# Altium PCB rf practical board.PcbDoc (part 1 of 2)
Units mm, origin at the board's own origin, x right, y up, seen from the top; angles counter-clockwise.
Board outline 70.56 x 65.43 mm, 4 copper layers (L1, L2, L3, L4), stack 0.603 mm thick; 77 components, 60 nets, 362 pads, 171 vias.
Unrouted connection lines stored in the file: 193.
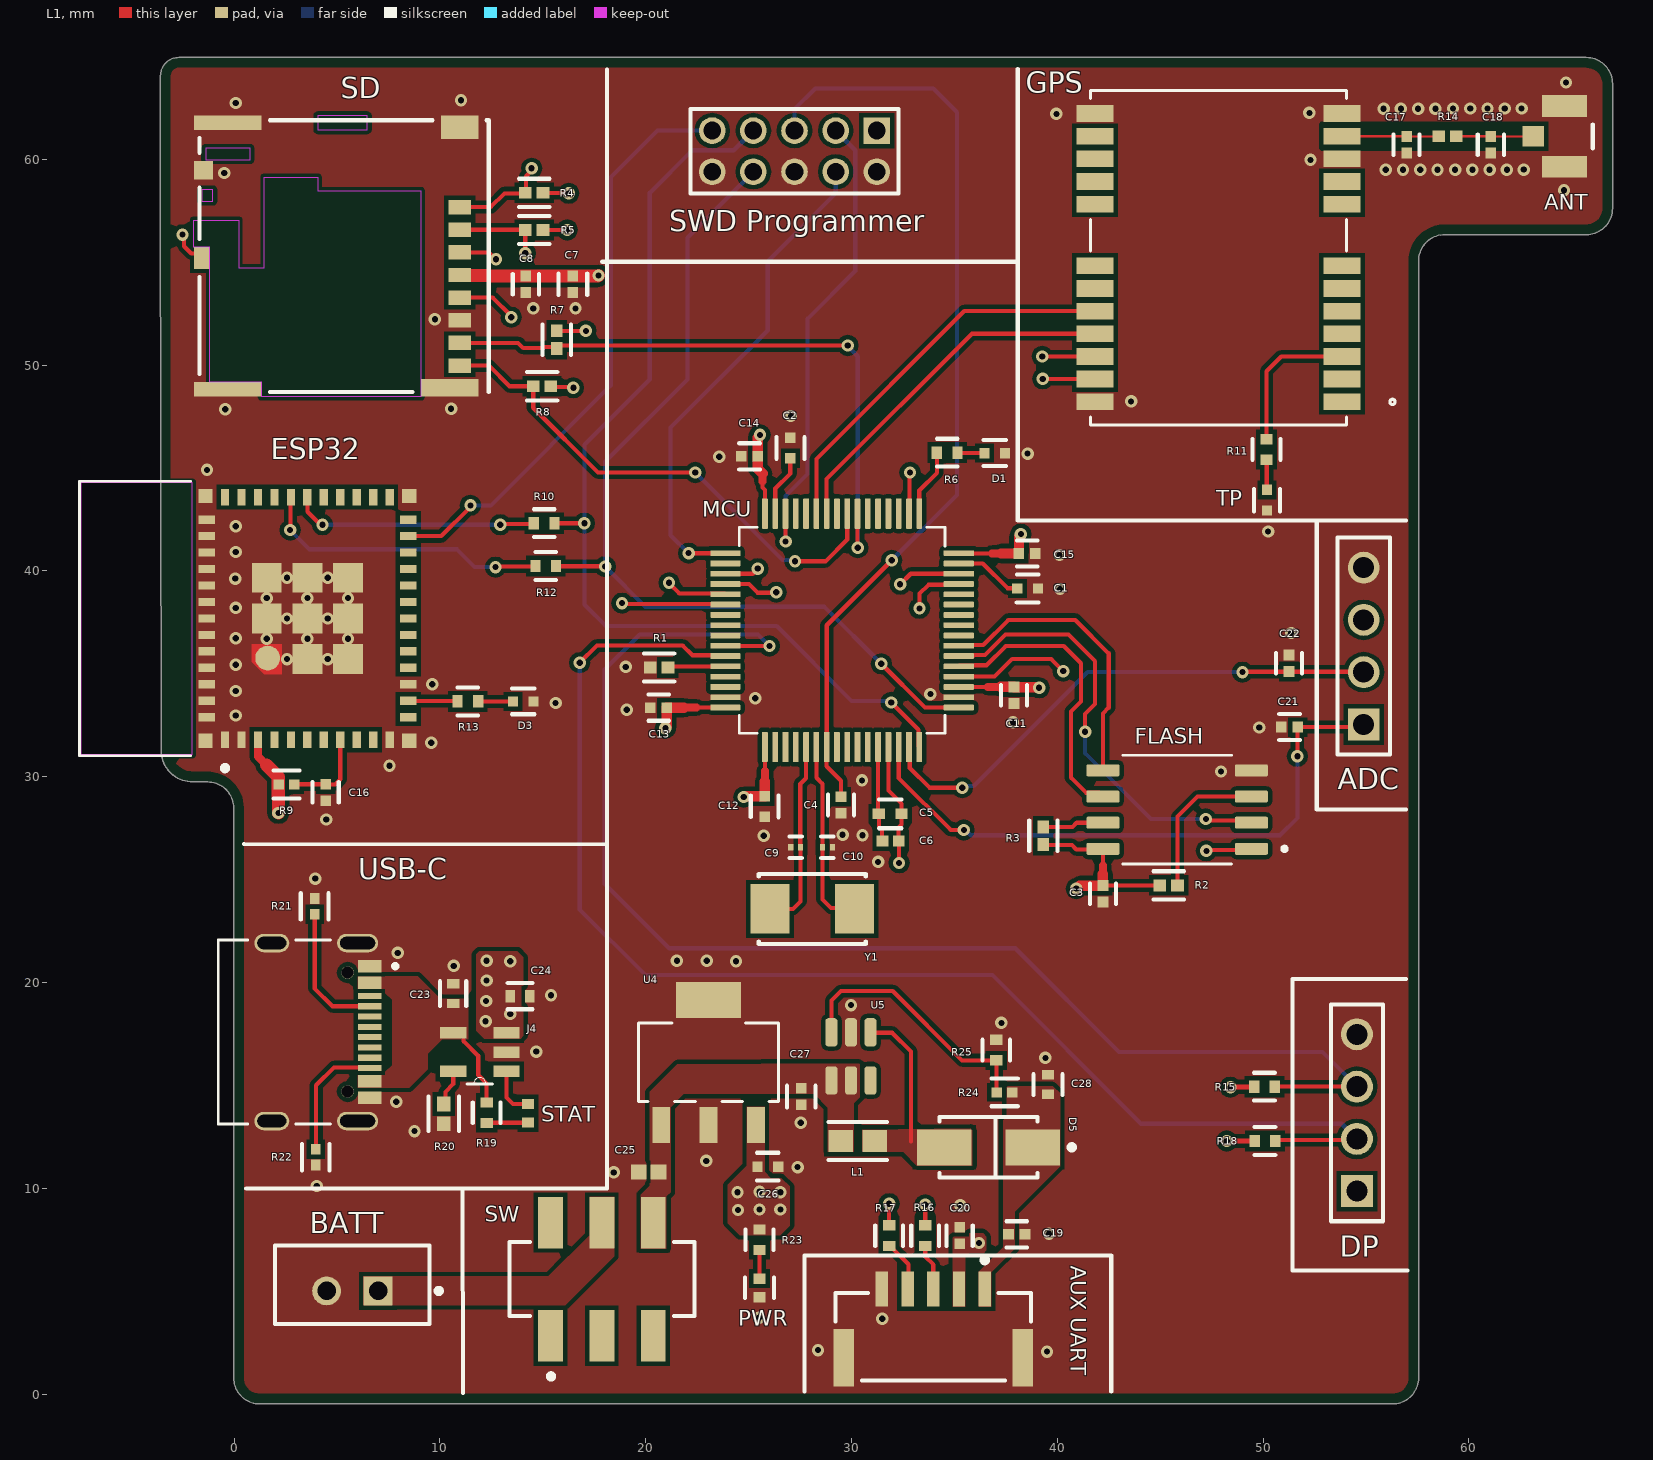
[diagram p0: L1 view]
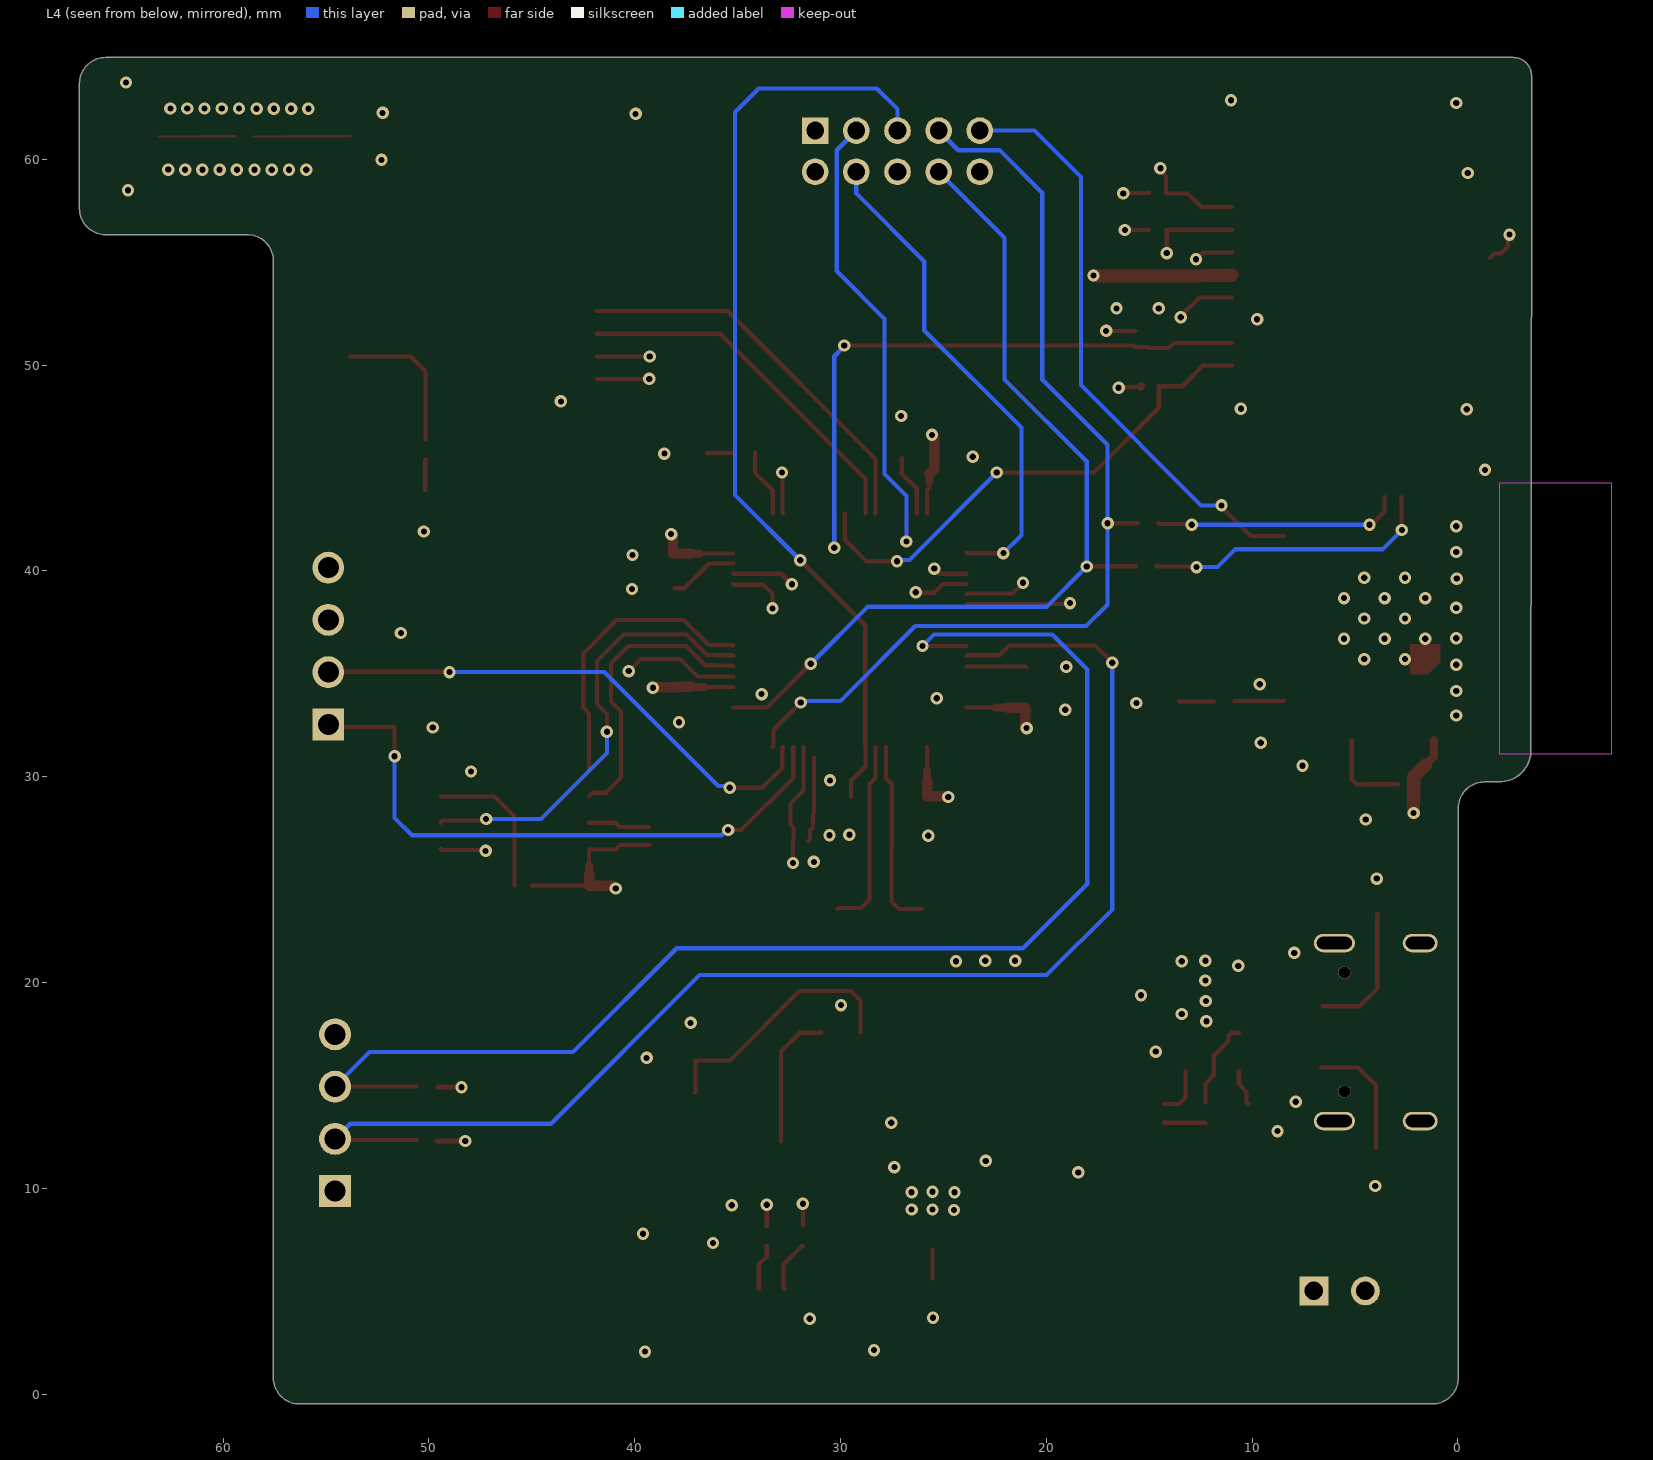
[diagram p1: L4 view, seen from below]
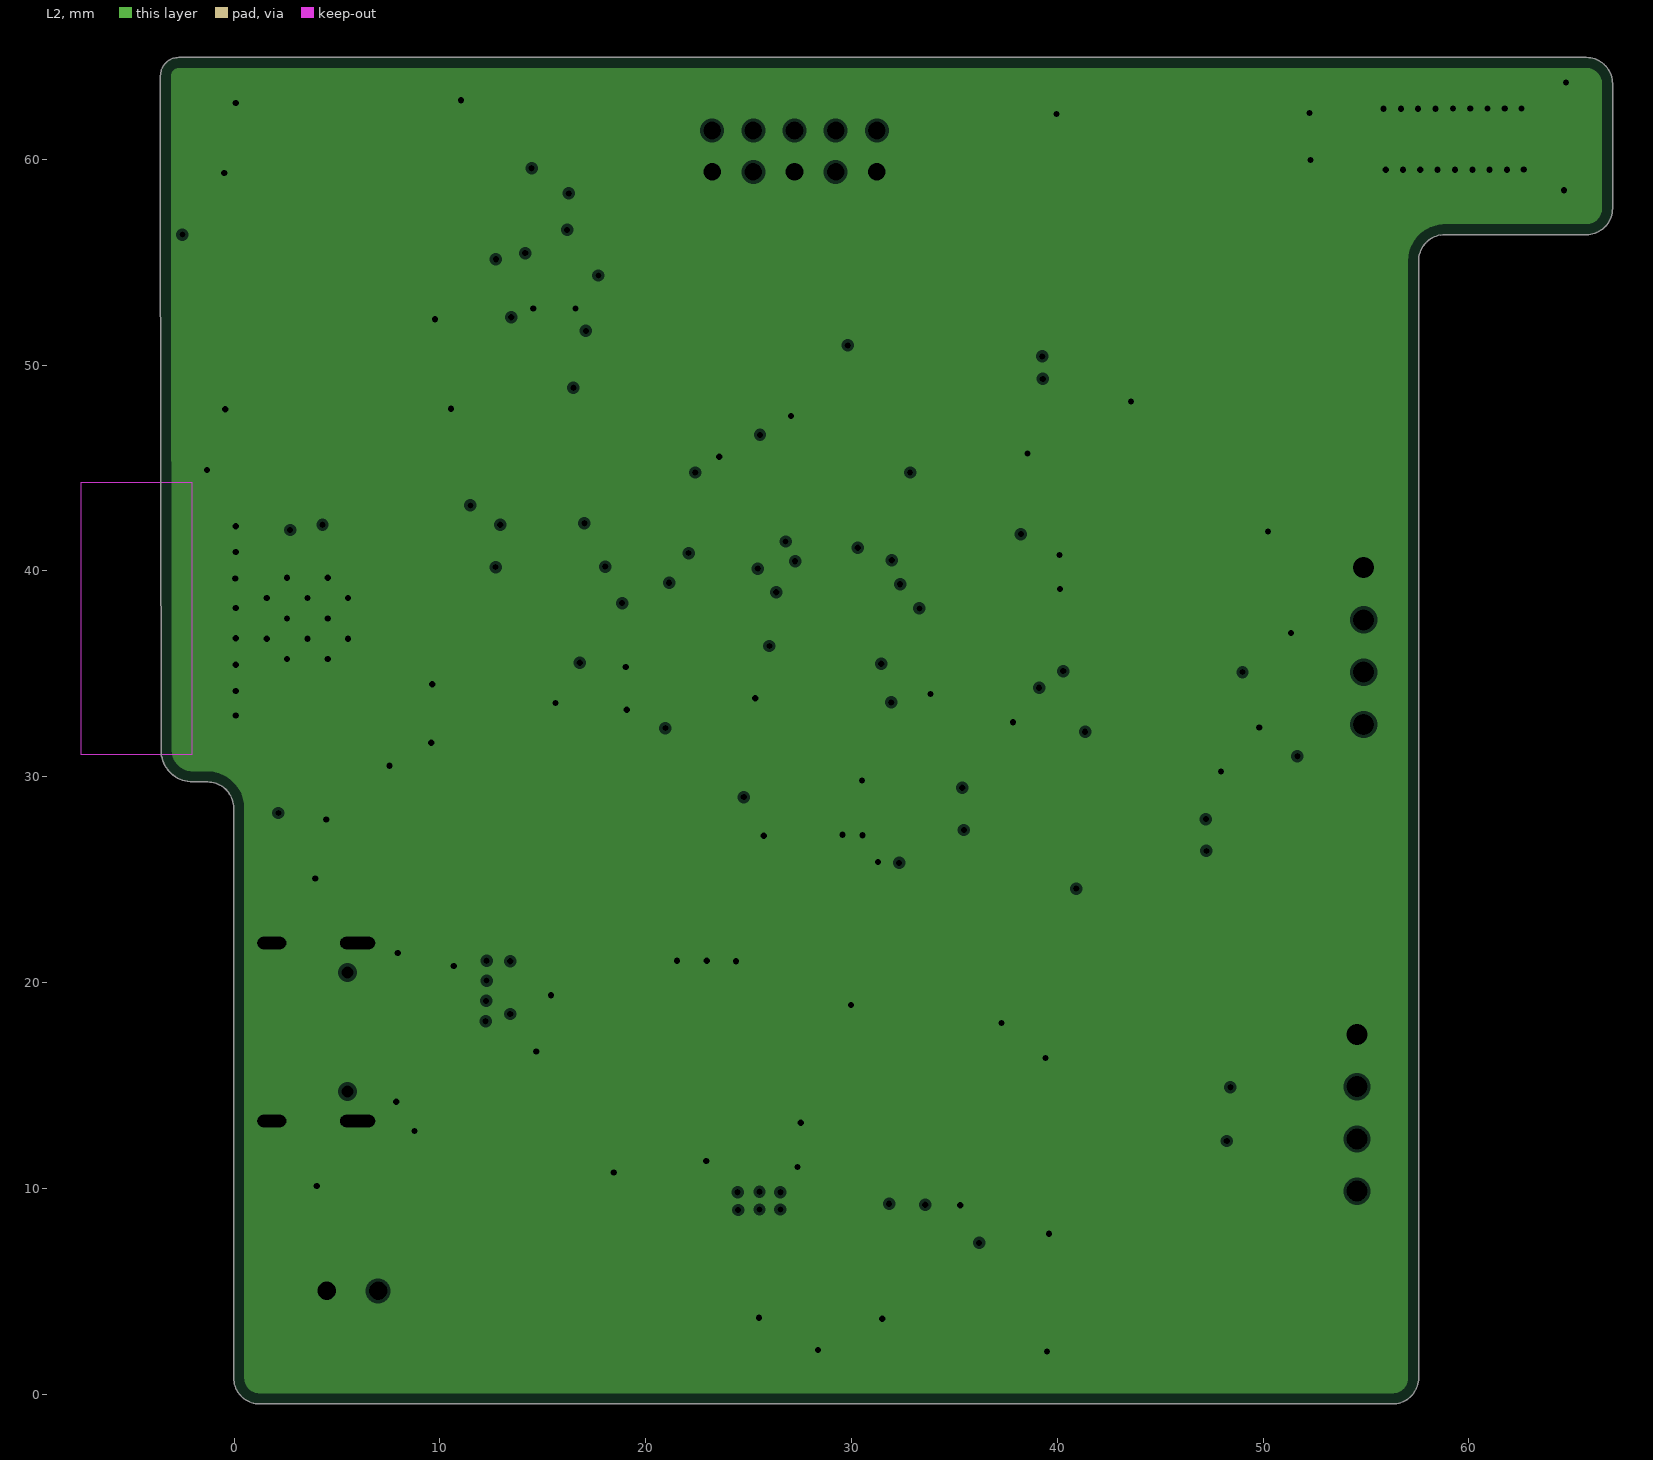
[diagram p2: L2, clearances drawn from the general rule]
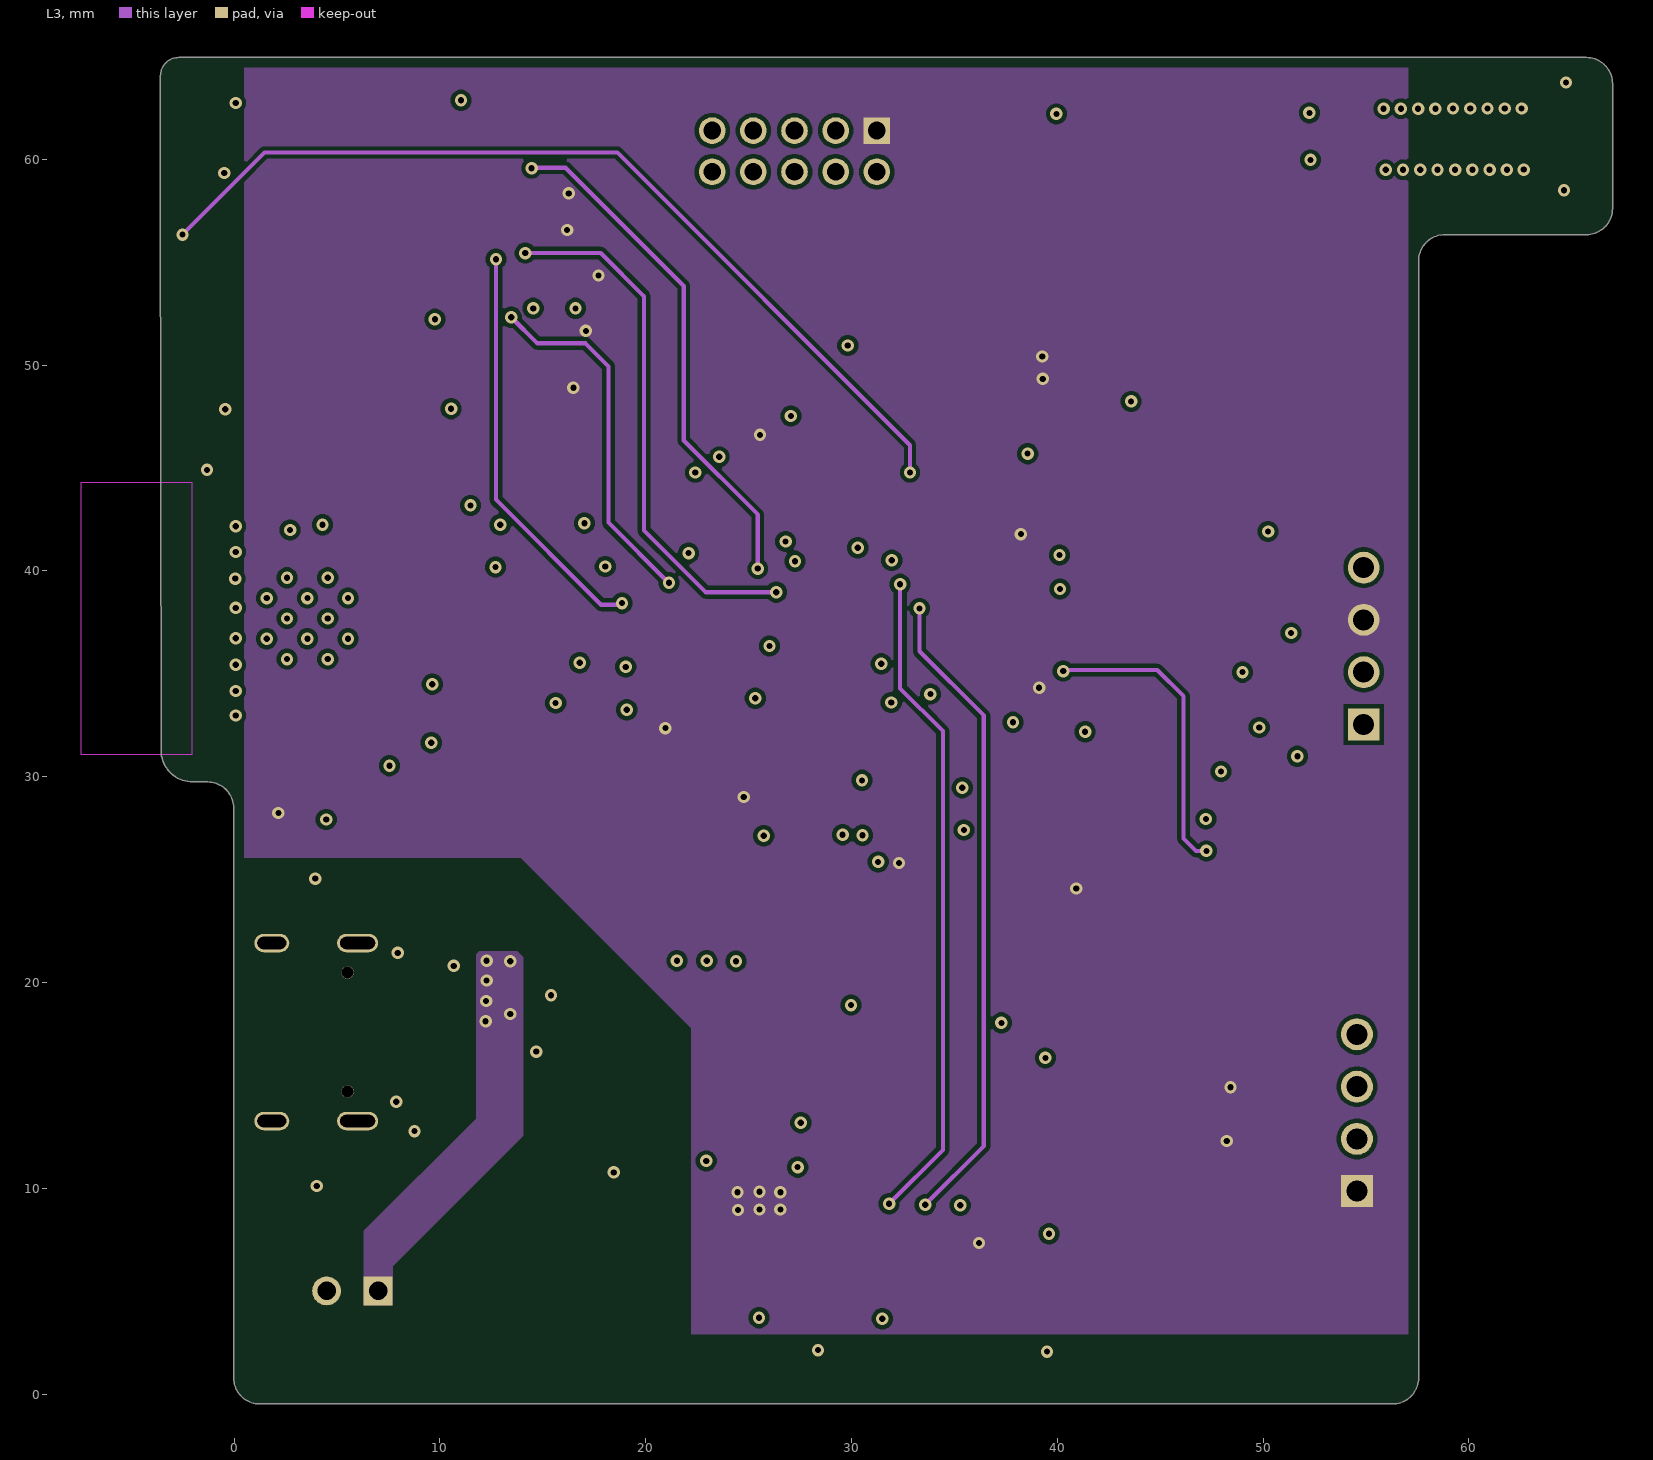
[diagram p3: L3]
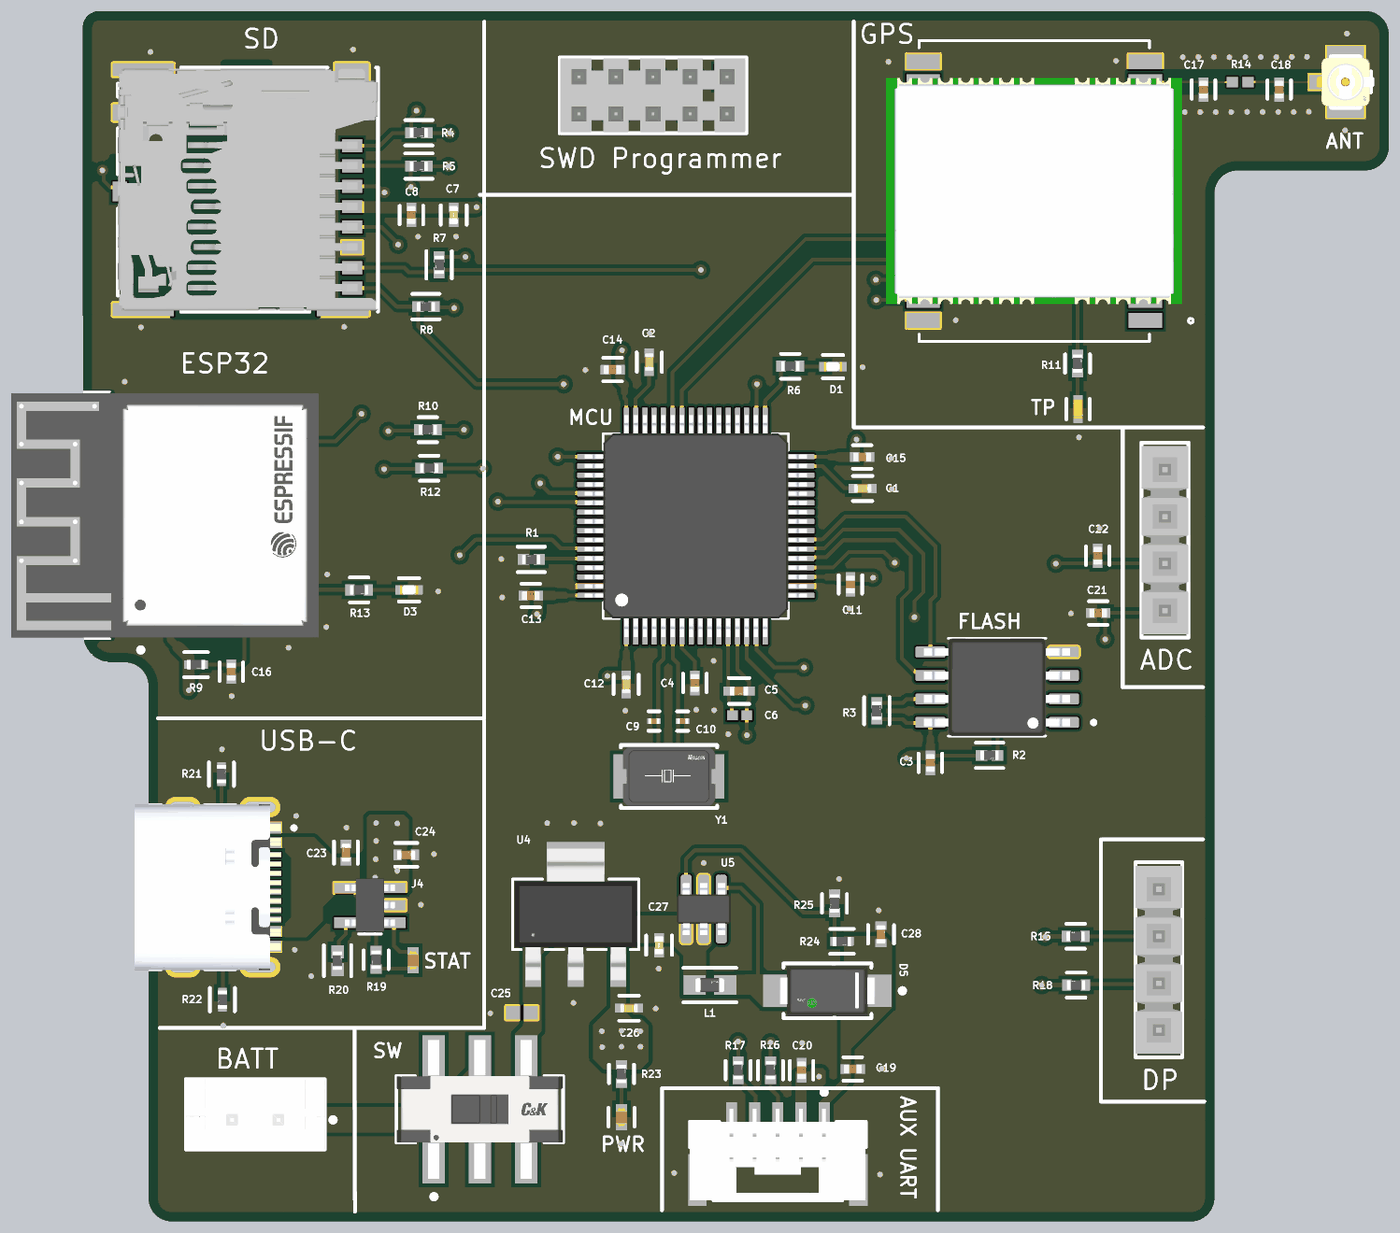
[diagram p4: 3D render of the assembled board from above, using the file's embedded part models]

## Layer stack, top to bottom
Top Solder: solder mask 0.0102, Solder Resist, Dk 3.5
L1: signal copper 0.0356
Dielectric 2: prepreg 0.0711, PP-006, Dk 4.1
L2: plane copper 0.035, net GND
Dielectric 1: dielectric 0.32, FR-4, Dk 4.8
L3: signal copper 0.035
Dielectric 3: prepreg 0.0711, PP-006, Dk 4.1
L4: signal copper 0.0356
Bottom Solder: solder mask 0.0102, Solder Resist, Dk 3.5

## Board outline
1.245,-0.483 cw(c1.245,0.787) -0.025,0.787 -0.025,28.473 ccw(c-1.295,28.473) -1.295,29.743 -2.016,29.743 cw(c-2.016,31.282) -3.554,31.282 -3.581,59.334 -3.581,64.059 cw(c-2.692,64.059) -2.692,64.948 65.71,64.948 cw(c65.71,63.678) 66.98,63.678 66.98,57.607 cw(c65.71,57.607) 65.71,56.337 58.826,56.337 ccw(c58.826,55.067) 57.556,55.067 57.556,44.475 57.556,0.787 cw(c56.286,0.787) 56.286,-0.483

## Design rules (kind name [scope] priority, off if disabled: settings)
Clearance [All] p1: gap=0.203 ignorepadtopadclearanceinfootprint=TRUE
MinimumSolderMaskSliver [All] p1: minsoldermaskwidth=0
NetAntennae [Not IsVia] p1: netantennaetolerance=0.508
PlaneClearance [All] p1: clearance=0.152
PlaneConnect [All] p1: pad.planeconnectstyle=Relief pad.reliefexpansion=0.508 pad.reliefentries=4 pad.reliefconductorwidth=0.254 pad.reliefairgap=0.254 via.planeconnectstyle=Direct via.reliefexpansion=0.508 via.reliefentries=4 via.reliefconductorwidth=0.254 via.reliefairgap=0.254
PolygonConnect [All] p1: connectstyle=Direct reliefconductorwidth=0.254 reliefentries=4 polygonreliefangle="90 Angle" airgapwidth=0.254
RoutingVias [All] p1: holewidth=0.711 width=1.27 viastyle="Through Hole" minholewidth=0.3 minwidth=0.6 maxholewidth=0.711 maxwidth=1.27
ShortCircuit [All] p1: allowed=TRUE
SilkToSilkClearance [All] p1: silktosilkclearance=0.076
SilkToSolderMaskClearance [IsPad] p1: minsilkscreentomaskgap=0.051 clearancetoexposedcopper=TRUE
SolderMaskExpansion [All] p1: expansion=0.102 istentingtop=FALSE
SupplyNets "Schematic Supply Nets" [InNet('GND')] p1: voltage=0.000
Width [All] p1: maxlimit=1.27 minlimit=0.102 preferedwidth=0.203 minimp=50.000000 maximp=50.000000 favimp=50.000000
23 further rules are at their usual default settings.

## Classes and differential pairs
component class U_RF_Sensors: C16 C17 C18 D3 J1 J2 MD1 P2 P3 R9 R10 R11 R12 R13 R14 TP U3
component class U_Power: C23 C24 C25 C26 C27 C28 D5 J3 J4 L1 PWR R19 R20 R21 R22 R23 R24 R25 STAT SW1 U4 U5 USB-C
component class U_MCU,SD,FLASH: C1 C2 C3 C4 C5 C6 C7 C8 C9 C10 C11 C12 C13 C14 C15 D1 P1 R1 R2 R3 R4 R5 R6 R7 R8 SD1 U1 U2 Y1

## Components (designator, comment, footprint, x,y, rotation, side; value= is the part's Value field where it differs from the comment)
ADC "TSW-104-08-L-S" SMTC-TSW-104-08-X-S 54.889,32.537 r90 top
ANT "U.FL-R-SMT-1(10)" FP-U_FL-R-SMT-1_10-MFG 64.643,61.112 r90 top (schematic designator J1)
"AUX UART" "BM05B-GHS-TBT (LF)(SN)(N)" FP-BM05B-GHS-TBT_LF_SN-MFG 33.974,2.78 r0 top
BATT "B2B-EH(LF)(SN)" FP-B2B-EH_LF_SN-MFG 5.74,5.309 r180 top (schematic designator J3)
C1 "2.2uF" FP-CC0402-MFG 38.557,39.141 r0 top value="2.2 uF"
C2 "2.2uF" FP-CC0402-MFG 27.026,45.974 r90 top value="2.2 uF"
C3 "100nF" FP-C0402-BB-MFG 42.215,24.308 r90 top value="0.10 μF"
C4 "100nF" FP-C0402-BB-MFG 29.489,28.626 r90 top value="0.10 μF"
C5 "0402YD105MAT2A" FP-0402-L_1_0_1-W_0_5_0_1-MFG 31.877,28.194 r0 top
C6 "04025C103JAT2A" CAPC1005X56X25LL10T15 31.902,26.873 r180 top
C7 "10uF" FP-C0402C106M9PACTU-MFG 16.459,53.924 r270 top
C8 "100nF" FP-C0402-BB-MFG 14.173,53.924 r90 top value="0.10 μF"
C9 "18pF" FP-GJM033-0_03P-MFG 27.28,26.568 r180 top
C10 "18pF" FP-GJM033-0_03P-MFG 28.829,26.568 r0 top
C11 "100nF" FP-C0402-BB-MFG 37.897,33.953 r90 top value="0.10 μF"
C12 "4.7uF" FP-CC0402-MFG 25.781,28.55 r270 top value="4.7 uF"
C13 "100nF" FP-C0402-BB-MFG 20.625,33.35 r0 top value="0.10 μF"
C14 "100nF" FP-C0402-BB-MFG 25.044,45.568 r0 top value="0.10 μF"
C15 "100nF" FP-C0402-BB-MFG 38.532,40.843 r180 top value="0.10 μF"
C16 "C0402C104M8RACTU" FP-C0402-BB-MFG 4.445,29.235 r90 top value="0.10 μF"
C17 "C0402C104M8RACTU" FP-C0402-BB-MFG 56.972,60.706 r90 top value="18 pF"
C18 "C0402C104M8RACTU" FP-C0402-BB-MFG 61.062,60.706 r90 top value="18 pF"
C19 "100nF" FP-C0402-BB-MFG 38.024,7.76 r0 top value="0.10 μF"
C20 "100nF" FP-C0402-BB-MFG 35.255,7.696 r90 top value="0.10 μF"
C21 "100nF" FP-C0402-BB-MFG 51.283,32.41 r0 top value="0.10 μF"
C22 "100nF" FP-C0402-BB-MFG 51.257,35.509 r270 top value="0.10 μF"
C23 "GRM155C80J475ME01D" FP-GRM155-0_2-MFG 10.643,19.456 r90 top
C24 "GRM155C80J475ME01D" FP-GRM155-0_2-MFG 13.894,19.329 r0 top
C25 "C0402C105M9PACTU" CAPC1005X60X30ML05T10 20.142,10.795 r180 top
C26 "CC0402KRX5R7BB225" FP-CC0402-CC-MFG 25.933,11.049 r0 top
C27 "10uF" FP-C0402C106M9PACTU-MFG 27.559,14.453 r90 top
C28 "22uF" FP-GRM158-0_2-MFG 39.548,15.037 r90 top
D1 "QBLP595-IB" FP-QBLP595-IB-MFG 36.957,45.72 r180 top
D3 "QBLP595-IB" FP-QBLP595-IB-MFG 14.046,33.655 r180 top
D5 "SS14" FP-403AE-MFG 36.652,11.989 r0 top
DP "TSW-104-08-L-S" SMTC-TSW-104-08-X-S 54.559,9.855 r90 top
ESP32 "ESP32-C3-MINI-1-N4" FP-ESP32-C3-MINI-1-N4-MFG 3.556,37.687 r90 top (schematic designator MD1)
FLASH "W25Q128JVSIQ" SOIC127P790X216-8N 45.822,28.397 r180 top (schematic designator U2)
GPS "NEO-M8T-0" NEO-M8T_UBL 47.828,55.22 r180 top (schematic designator U3)
J4 "MCP73831T-2ACI/OT" SOT95P280X145-5N 11.938,16.612 r180 top
L1 "MLZ1608N220LT000" FP-MLZ1608-IPC_A 30.302,12.294 r0 top
MCU "STM32F405RGT6" QFP50P1200X1200X160-64N 29.54,37.109 r90 top locked (schematic designator U1)
PWR "SML-P12VTT86R" FP-SML-P1-MFG 25.527,5.156 r90 top (schematic designator D6)
R1 "10k" FP-AF0402-IPC_B 20.65,35.306 r180 top
R2 "10k" FP-AF0402-IPC_B 45.412,24.714 r0 top
R3 "10k" FP-AF0402-IPC_B 39.319,27.127 r90 top
R4 "10k" FP-AF0402-IPC_B 14.58,58.369 r0 top
R5 "10k" FP-AF0402-IPC_B 14.58,56.566 r0 top
R6 "AC0402JR-13470RL" FP-AC0402-MFG 34.646,45.745 r0 top
R7 "10k" FP-AF0402-IPC_B 15.672,51.232 r270 top
R8 "10k" FP-AF0402-IPC_B 14.961,48.971 r180 top
R9 "AC0402DR-07510KL" FP-AC0402-IPC_C 2.54,29.616 r0 top
R10 "100" FP-AC0402-MFG 15.062,42.316 r0 top
R11 "AC0402JR-13470RL" FP-AC0402-MFG 50.165,45.898 r90 top
R12 "100" FP-AC0402-MFG 15.138,40.234 r0 top
R13 "AC0402JR-13470RL" FP-AC0402-MFG 11.354,33.655 r0 top
R14 "RC0402JR-100RL" RESC1005X40X25NL05T10 58.953,61.112 r0 top
R15 "AC0402FR-134K7L" FP-AC0402-MFG 50.063,14.935 r180 top
R16 "100" FP-AC0402-MFG 33.579,7.696 r90 top
R17 "100" FP-AC0402-MFG 31.826,7.696 r90 top
R18 "AC0402FR-134K7L" FP-AC0402-MFG 50.089,12.294 r180 top
R19 "AC0402JR-13470RL" FP-AC0402-MFG 12.268,13.665 r270 top
R20 "AC0402FR-132KL" FP-AC0402-IPC_A 10.185,13.614 r90 top
R21 "AC0402JR-075K1L" FP-AC0402-IPC_C 3.912,23.698 r90 top
R22 "AC0402JR-075K1L" FP-AC0402-IPC_C 3.962,11.506 r270 top
R23 "10k" FP-AC0402-MFG 25.527,7.493 r90 top
R24 "73.2k" FP-AF0402-IPC_C 37.44,14.656 r0 top
R25 "10k" FP-AC0402-MFG 37.033,16.713 r270 top
SD "503398-1892" MOLX-503398-1892_V 4.699,55.296 r270 top (schematic designator SD1)
STAT "SML-P12VTT86R" FP-SML-P1-MFG 14.275,13.64 r90 top (schematic designator D4)
SW "JS202011SCQN" FP-JS202011SCQN-MFG 17.871,5.581 r0 top (schematic designator SW1)
"SWD Programmer" "PTT-105-01-L-D" SMTC-PTT-105-01-X-D 31.229,61.392 r180 top
TP "QBLP595-Y" FP-QBLP595-Y-MFG 50.19,43.434 r90 top (schematic designator D2)
U4 "AP7361C-33E-13" SOT223_DIO 23.052,16.116 r0 top
U5 "MT3608" SOT95P280X145-6N 29.972,16.408 r270 top
USB-C "TYPE-C-31-M-12" HRO_TYPE-C-31-M-12 1.829,17.59 r270 top (schematic designator J5)
Y1 "ABM3-8.000MHZ-B4Y-T" FP-ABM3-MFG 28.092,23.571 r0 top

## Footprints (in the part's own frame and the unit in brackets; to place one, negate y for a bottom-side part, rotate by r counter-clockwise, add the part's x,y. Pads: shape width x height; smd on the part's side, far side on the other; paste and mask are expansions set on the pad)
CAPC1005X56X25LL10T15 [mm] "Chip Capacitor, 2-Leads, Body 1.00x0.50mm, IPC High Density"
  rect 0.58x0.54 smd: 1(-0.39,0) 2(0.39,0)
  body extent -0.55,-0.3 0.55,0.3, height 0.56
CAPC1005X60X30ML05T10 [mm] "Chip Capacitor, 2-Leads, Body 1.00x0.50mm, IPC Low Density"
  rect 0.76x0.72 smd: 1(-0.48,0) 2(0.48,0)
  body extent -0.53,-0.28 0.53,0.27, height 0.6
FP-0402-L_1_0_1-W_0_5_0_1-MFG [mm]
  rect 0.6x0.5 smd paste+0 mask+0: 1(-0.55,0) 2(0.55,0)
  silkscreen extent -0.55,-0.7 0.55,0.7, body extent -0.95,-0.4 0.95,0.4, height 0.25
FP-403AE-MFG [mm]
  rect 2.65x1.75 smd paste+0 mask+0: 1(-2.15,0) 2(2.15,0)
  silkscreen extent -2.37,-1.48 4.18,1.48, body extent -3.57,-1.58 3.57,1.58, height 0.25
FP-ABM3-MFG [mm]
  rect 1.9x2.4 smd paste+0 mask+0: 1(-2.05,0) 2(2.05,0)
  silkscreen extent -2.6,-1.7 2.6,1.7, body extent -3.1,-1.8 3.1,1.8, height 0.25
FP-AC0402-IPC_A [mm]
  rect 0.715x0.672 smd paste+0 mask+0: 1(-0.479,0) 2(0.479,0)
  silkscreen extent -0.84,-0.74 0.84,0.74, body extent -1.04,-0.54 1.04,0.54, height 0.25
FP-AC0402-IPC_C [mm]
  rect 0.515x0.472 smd paste+0 mask+0: 1(-0.379,0) 2(0.379,0)
  silkscreen extent -0.64,-0.67 0.64,0.67, body extent -0.74,-0.38 0.74,0.38, height 0.25
FP-AC0402-MFG [mm]
  rect 0.5x0.6 smd paste+0 mask+0: 1(-0.5,0) 2(0.5,0)
  silkscreen extent -0.5,-0.67 0.5,0.67, body extent -0.85,-0.4 0.85,0.4, height 0.25
FP-AF0402-IPC_B [mm]
  rect 0.615x0.572 smd paste+0 mask+0: 1(-0.429,0) 2(0.429,0)
  silkscreen extent -0.74,-0.69 0.74,0.69, body extent -0.89,-0.44 0.89,0.44, height 0.25
FP-AF0402-IPC_C [mm]
  rect 0.515x0.472 smd paste+0 mask+0: 1(-0.379,0) 2(0.379,0)
  silkscreen extent -0.64,-0.67 0.64,0.67, body extent -0.74,-0.38 0.74,0.38, height 0.25
FP-B2B-EH_LF_SN-MFG [mm]
  rect 1.4x1.4 hole 0.9 paste-2539.97 mask+0: 1(-1.25,0.3)
  round 1.4 hole 0.9 paste-2539.97 mask+0: 2(1.25,0.3)
  silkscreen extent -4.33,-1.9 3.75,1.9, body extent -3.85,-2 3.85,2, height 0.25
FP-BM05B-GHS-TBT_LF_SN-MFG [mm]
  rect 0.6x1.7 smd paste+0 mask+0: 1(2.5,2.325) 2(1.25,2.325) 3(0,2.325) 4(-1.25,2.325) 5(-2.5,2.325)
  rect 1x2.8 smd paste+0 mask+0: 6(-4.35,-1.025) 7(4.35,-1.025)
  silkscreen extent -4.75,-2.12 4.75,3.85, body extent -4.95,-2.52 4.95,3.27, height 0.25
FP-C0402-BB-MFG [mm]
  rect 0.52x0.52 smd paste+0 mask+0: 1(-0.4,0) 2(0.4,0)
  silkscreen extent -0.5,-0.64 0.5,0.64, body extent -0.8,-0.4 0.8,0.4, height 0.25
FP-C0402C106M9PACTU-MFG [mm]
  rect 0.52x0.52 smd paste+0 mask+0: 1(-0.4,0) 2(0.4,0)
  silkscreen extent -0.53,-0.7 0.53,0.7, body extent -0.76,-0.38 0.76,0.38, height 0.25
FP-CC0402-CC-MFG [mm]
  rect 0.5x0.5 smd paste+0 mask+0: 1(-0.5,0) 2(0.5,0)
  silkscreen extent -0.53,-0.68 0.53,0.67, body extent -0.95,-0.55 0.95,0.55, height 0.25
FP-CC0402-MFG [mm]
  rect 0.5x0.5 smd paste+0 mask+0: 1(-0.5,0) 2(0.5,0)
  silkscreen extent -0.53,-0.68 0.53,0.67, body extent -0.87,-0.48 0.87,0.48, height 0.25
FP-ESP32-C3-MINI-1-N4-MFG [mm]
  rect 0.8x0.4 smd paste+0 mask+0: 1(-5.9,4) 2(-5.9,3.2) 3(-5.9,2.4) 4(-5.9,1.6) 5(-5.9,0.8) 6(-5.9,0) 7(-5.9,-0.8) 8(-5.9,-1.6) 9(-5.9,-2.4) 10(-5.9,-3.2) 11(-5.9,-4) 25(5.9,-4) 26(5.9,-3.2) 27(5.9,-2.4) 28(5.9,-1.6) 29(5.9,-0.8) 30(5.9,0) 31(5.9,0.8) 32(5.9,1.6) 33(5.9,2.4) 34(5.9,3.2) 35(5.9,4)
  rect 0.4x0.8 smd paste+0 mask+0: 12(-4.8,-4.9) 13(-4,-4.9) 14(-3.2,-4.9) 15(-2.4,-4.9) 16(-1.6,-4.9) 17(-0.8,-4.9) 18(0,-4.9) 19(0.8,-4.9) 20(1.6,-4.9) 21(2.4,-4.9) 22(3.2,-4.9) 23(4,-4.9) 24(4.8,-4.9) 36(4.8,4.9) 37(4,4.9) 38(3.2,4.9) 39(2.4,4.9) 40(1.6,4.9) 41(0.8,4.9) 42(0,4.9) 43(-0.8,4.9) 44(-1.6,4.9) 45(-2.4,4.9) 46(-3.2,4.9) 47(-4,4.9) 48(-4.8,4.9)
  rect 1.45x1.45 smd paste+0 mask+0: 49(-1.975,-1.975) 49(-1.975,0) 49(0,1.975) 49(0,0) 49(0,-1.975) 49(1.975,-1.975) 49(1.975,0) 49(1.975,1.975)
  round 1.207 smd paste+0 mask+0: 49(-1.926,1.926)
  rect 0.7x0.7 smd paste+0 mask+0: 50(5.95,4.95) 51(5.95,-4.95) 52(-5.95,-4.95) 53(-5.95,4.95)
  L1 region: -2.7,1.25 -2.7,2.1 -2.1,2.7 -1.25,2.7 -1.25,1.25
  Keep-Out Layer region: -6.6,5.6 6.6,5.6 6.6,11 -6.6,11
  silkscreen extent -7.4,3.87 6.68,11.07, body extent -6.78,-5.77 6.78,11.17, height 0.25
FP-GJM033-0_03P-MFG [mm]
  rect 0.25x0.3 smd paste+0 mask+0: 1(-0.238,0) 2(0.238,0)
  silkscreen extent -0.3,-0.53 0.3,0.53, body extent -0.46,-0.27 0.46,0.27, height 0.25
FP-GRM155-0_2-MFG [mm]
  rect 0.45x0.6 smd paste+0 mask+0: 1(-0.475,0) 2(0.475,0)
  silkscreen extent -0.6,-0.64 0.6,0.65, body extent -0.8,-0.45 0.8,0.45, height 0.25
FP-GRM158-0_2-MFG [mm]
  rect 0.45x0.6 smd paste+0 mask+0: 1(-0.475,0) 2(0.475,0)
  silkscreen extent -0.5,-0.7 0.5,0.7, body extent -0.8,-0.45 0.8,0.45, height 0.25
FP-JS202011SCQN-MFG [mm]
  rect 1.2x2.5 smd paste+0 mask+0: 1(-2.5,-2.75) 2(0,-2.75) 3(2.5,-2.75) 4(-2.5,2.75) 5(0,2.75) 6(2.5,2.75)
  silkscreen extent -4.5,-4.85 4.5,1.8, body extent -4.6,-4.1 4.6,4.1, height 0.25
FP-MLZ1608-IPC_A [mm]
  rect 1.206x1.058 smd paste+0 mask+0: 1(-0.826,0) 2(0.826,0)
  silkscreen extent -1.43,-0.93 1.43,0.93, body extent -1.93,-1.03 1.93,1.03, height 0.25
FP-QBLP595-IB-MFG [mm]
  rect 0.5x0.5 smd paste+0 mask+0: 1(-0.5,0) 2(0.5,0)
  silkscreen extent -0.55,-0.63 0.55,0.63, body extent -0.85,-0.4 0.85,0.4, height 0.25
FP-QBLP595-Y-MFG [mm]
  rect 0.5x0.5 smd paste+0 mask+0: 1(-0.5,0) 2(0.5,0)
  silkscreen extent -0.56,-0.63 0.55,0.63, body extent -0.85,-0.4 0.85,0.4, height 0.25
FP-SML-P1-MFG [mm]
  rect 0.5x0.6 smd paste+0 mask+0: 1(-0.45,0) 2(0.45,0)
  silkscreen extent -0.5,-0.7 0.5,0.7, body extent -0.8,-0.43 0.8,0.43, height 0.25
FP-U_FL-R-SMT-1_10-MFG [mm]
  rect 1x1.05 smd paste-1000 mask+0: 1(0,1.525)
  rect 1.05x2.2 smd paste-1000 mask+0: 2(-1.475,0) 3(1.475,0)
  silkscreen extent -0.58,-1.38 0.58,-1.38, body extent -2.1,-1.48 2.1,2.15, height 0.25
HRO_TYPE-C-31-M-12 [mm]
  rect 0.6x1.14 smd mask+0.05: A1_B12(-3.2,4.75) A4_B9(-2.4,4.75) B1_A12(3.2,4.75) B4_A9(2.4,4.75)
  rect 0.3x1.14 smd mask+0.05: A5(-1.25,4.75) A6(-0.25,4.75) A7(0.25,4.75) A8(1.25,4.75) B5(1.75,4.75) B6(0.75,4.75) B7(-0.75,4.75) B8(-1.75,4.75)
  oval 0.9x2 hole 0.6 slot 1.7 at 90 deg: S1(-4.325,4.17) S2(4.325,4.17)
  oval 0.9x1.7 hole 0.6 slot 1.4 at 90 deg: S3(-4.325,0) S4(4.325,0)
  round 0.6 hole 0.6 unplated: ""(-2.89,3.68) ""(2.89,3.68)
  silkscreen extent -4.47,-2.6 4.47,6.1, body extent -4.47,-2.6 4.47,5.31, height 3.31
MOLX-503398-1892_V [mm] "CONN, 8-Leads, Body 14.05x13.2mm, Pitch 1.1mm"
  rect 0.7x1.1 smd: 1(-2.38,6.27) 2(-1.28,6.27) 3(-0.18,6.27) 4(0.92,6.27) 5(2.02,6.27) 6(3.12,6.27) 7(4.22,6.27) 8(5.32,6.27)
  rect 1.05x0.78 smd: 9(0.095,-6.27)
  rect 0.9x0.93 smd: 10(-4.17,-6.195)
  rect 0.86x2.8 smd: 11(6.4,5.77)
  rect 0.7x3.3 smd: 12(6.48,-5.01) 13(-6.48,-5.01)
  rect 1.14x1.83 smd: 14(-6.26,6.255)
  L1 keep-out region: -3.22,-6.28 -2.67,-6.28 -2.67,-5.73 -3.22,-5.73
  L1 keep-out region: -5.235,-6.08 -4.685,-6.08 -4.685,-3.93 -5.235,-3.93
  L1 keep-out region: -6.83,-0.63 -6.13,-0.63 -6.13,1.77 -6.83,1.77
  L1 keep-out region: 6.83,4.37 6.83,-3.36 6.13,-3.36 6.13,-5.88 -0.43,-5.88 -0.43,-6.66 -1.73,-6.66 -1.73,-4.48 0.57,-4.48 0.57,-3.23 -3.82,-3.23 -3.82,-0.63 -3.17,-0.63 -3.17,4.37
  silkscreen extent -6.6,-6.38 6.6,7.67, body extent -6.55,-6.38 6.55,7.67, height 1.28
NEO-M8T_UBL [mm]
  rect 1.803x0.813 smd: 1(-6,7) 2(-6,5.9) 3(-6,4.8) 4(-6,3.7) 5(-6,2.6) 6(-6,1.5) 7(-6,0.4) 8(-6,-2.6) 9(-6,-3.7) 10(-6,-4.8) 11(-6,-5.9) 12(-6,-7) 13(6,-7) 14(6,-5.9) 15(6,-4.8) 16(6,-3.7) 17(6,-2.6) 18(6,0.4) 19(6,1.5) 20(6,2.6) 21(6,3.7) 22(6,4.8) 23(6,5.9) 24(6,7)
  silkscreen extent -8.59,-8.13 6.22,8.13, body extent -8,-6.1 8,6.1, height 2.6
QFP50P1200X1200X160-64N [mm]
  rrect25% 1.47x0.28 smd: 1(-5.67,3.75) 2(-5.67,3.25) 3(-5.67,2.75) 4(-5.67,2.25) 5(-5.67,1.75) 6(-5.67,1.25) 7(-5.67,0.75) 8(-5.67,0.25) 9(-5.67,-0.25) 10(-5.67,-0.75) 11(-5.67,-1.25) 12(-5.67,-1.75) 13(-5.67,-2.25) 14(-5.67,-2.75) 15(-5.67,-3.25) 16(-5.67,-3.75) 33(5.67,-3.75) 34(5.67,-3.25) 35(5.67,-2.75) 36(5.67,-2.25) 37(5.67,-1.75) 38(5.67,-1.25) 39(5.67,-0.75) 40(5.67,-0.25) 41(5.67,0.25) 42(5.67,0.75) 43(5.67,1.25) 44(5.67,1.75) 45(5.67,2.25) 46(5.67,2.75) 47(5.67,3.25) 48(5.67,3.75)
  rrect25% 0.28x1.47 smd: 17(-3.75,-5.67) 18(-3.25,-5.67) 19(-2.75,-5.67) 20(-2.25,-5.67) 21(-1.75,-5.67) 22(-1.25,-5.67) 23(-0.75,-5.67) 24(-0.25,-5.67) 25(0.25,-5.67) 26(0.75,-5.67) 27(1.25,-5.67) 28(1.75,-5.67) 29(2.25,-5.67) 30(2.75,-5.67) 31(3.25,-5.67) 32(3.75,-5.67) 49(3.75,5.67) 50(3.25,5.67) 51(2.75,5.67) 52(2.25,5.67) 53(1.75,5.67) 54(1.25,5.67) 55(0.75,5.67) 56(0.25,5.67) 57(-0.25,5.67) 58(-0.75,5.67) 59(-1.25,5.67) 60(-1.75,5.67) 61(-2.25,5.67) 62(-2.75,5.67) 63(-3.25,5.67) 64(-3.75,5.67)
  silkscreen extent -5,-5 5,5, body extent -6,-6 6,6, height 1.6
RESC1005X40X25NL05T10 [mm] "Chip Resistor, 2-Leads, Body 1.00x0.50mm, IPC Medium Density"
  rect 0.6x0.55 smd: 1(-0.425,0) 2(0.425,0)
  body extent -0.53,-0.27 0.53,0.28, height 0.4
SMTC-PTT-105-01-X-D [mil] "Press Fit Terminal Strip, 2x5 Pins, Vertical, 2mm Pitch, Male"
  rect 51x51 hole 34: 1(0,0)
  round 51 hole 34: 2(0,78.74) 3(78.74,0) 4(78.74,78.74) 5(157.48,0) 6(157.48,78.74) 7(236.22,0) 8(236.22,78.74) 9(314.96,0) 10(314.96,78.74)
  silkscreen extent -41,-41 356,120, body extent -39,-39 354,118, height 205
SMTC-TSW-104-08-X-S [mm] ".025 SQ Post Terminal Strip Assembly, 1x4 Pins, Vertical, 2.54mm Pitch, Male"
  rect 1.55x1.55 hole 1.02: 1(0,0)
  round 1.55 hole 1.02: 2(2.54,0) 3(5.08,0) 4(7.62,0)
  silkscreen extent -1.46,-1.27 9.08,1.27, body extent -1.27,-1.27 8.89,1.27, height 8.38
SOIC127P790X216-8N [mm]
  rrect25% 1.61x0.58 smd: 1(-3.605,1.905) 2(-3.605,0.635) 3(-3.605,-0.635) 4(-3.605,-1.905) 5(3.605,-1.905) 6(3.605,-0.635) 7(3.605,0.635) 8(3.605,1.905)
  silkscreen extent -5.32,-2.64 2.64,2.64, body extent -3.95,-2.64 3.95,2.64, height 2.16
SOT95P280X145-5N [mil]
  rect 50x22 smd: 1(-51,37) 2(-51,0) 3(-51,-37) 4(51,-37) 5(51,37)
  silkscreen extent -24,49 24,61, body extent -53,-57 53,57, height 57
SOT95P280X145-6N [mm]
  rrect50% 1.37x0.59 smd: 1(-1.17,0.95) 2(-1.17,0) 3(-1.17,-0.95) 4(1.17,-0.95) 5(1.17,0) 6(1.17,0.95)
  body extent -1.4,-1.45 1.4,1.45, height 1.45
SOT223_DIO [mil]
  rect 34x69 smd paste+0 mask+0: 1(-90.55,-119.5) 2(0,-119.5) 3(90.55,-119.5)
  rect 124x69 smd paste+0 mask+0: 4(0,119.5)
  silkscreen extent -134,-75 134,75, body extent -129,-140 129,140, height 71

## Part data
ADC DP: library part CMP-1024-00358-1, "0.025\" SQ Post Header, Through-hole, Vertical, -55 to 125 degC, 2.54 mm Pitch, 4-Pin, Male, RoHS", Manufacturer=Samtec, Temperature Range="-55 to 125 degC", ComponentLink1Description="Manufacturer URL", ComponentLink1URL=http://www.samtec.com, ComponentLink2Description=Datasheet, ComponentLink2URL=http://www.samtec.com/documents/webfiles/pdf/TSW_TH.PDF, ComponentLink3Description="Package Specification", ComponentLink3URL=http://www.samtec.com/documents/webfiles/cpdf/TSW-XXX-XX-XXX-X-XX-XXX-MKT.pdf, DatasheetVersion=F-214, Mounting Technology=Through-hole, Orientation=Vertical, PackageDescription=".025[0.64] SQ. Post Terminal Strip Assembly", PackageReference=TSW-104-08-X-S, PackageVersion="DM, 8/1988", PartNumber=TSW-104-08-L-S, Pitch="2.54 mm", RoHS=True
ANT: library part CMP-2000-05152-3, "CONN U.FL RCPT STR 50 OHM SMD", Dielectric Material=Polymer, Frequency=6GHz, Housing Color=Beige, Max Operating Temperature=90°C, Min Operating Temperature=-40°C, Package Quantity=2500, Insulation Resistance=500MR, Body Material=Bronze, Body Plating=Silver, Connector Type=Coaxial, Contact Material=Brass, Contact Plating=Gold, Depth=3.1mm, Fastening Type=Snap, Gender=Male, Lead Free="Lead Free", Length=3mm, Max Frequency=6GHz, Mount="Surface Mount", Orientation=Straight, Packaging="Cut Tape", Radiation Hardening=No, REACH SVHC="No SVHC", Series=U.FL, Termination=Solder, Weight=0.001764oz, Wire/Cable Type=Coaxial, Impedance=50R
"AUX UART": library part CMP-17439-000467-1, "CONN HEADER SMD 5POS 1.25MM", Color=Natural, Flammability Rating="UL94 V-0", Max Operating Temperature=85°C, Min Operating Temperature=-25°C, Voltage Rating=50V, Connector Type=Header, Contact Finish - Mating=TIN, Contact Material=Bronze, Contact Plating=Tin, Contact Shape=Rectangular, Contact Type="Outer Shroud Contact", Fastening Type=Ramp, Lead Free="Lead Free", Mated Stacking Heights=7.3mm, Mount="Surface Mount", Number of Pins=5, Number of Positions=5, Number of Rows=1, Packaging="Cut Tape", Pitch=0.049inch, Series=GH, Termination=Solder, Insulation Color=Natural, Insulation Material=Nylon
BATT: library part CMP-17439-000683-1, "Connector Header, EH Series, 2 Position, 2.5mm, Through Hole, Press-Fit, Solder, Natural", Current Rating=3A, Voltage Rating=250V, Contact Material=Brass, Lead Free="Lead Free", Mount="Through Hole", Number of Contacts=2, Number of Positions=2, Number of Rows=1, Orientation=Straight, Pitch=2.5mm, Series=EH, Termination=Solder
C1 C2: library part CMP-03422-000141-2, "CAP CER 2.2UF 16V X5R 0402", Capacitance="2.2 uF", Manufacturer=YAGEO, Manufacturer Part Number=CC0402MRX5R7BB225, Package=CC0402, Temperature="-55°C to +125°C", Temperature Characteristic=X5R, Temperature Coefficient=30ppm/°C, Temperature Range High=+125°C, Temperature Range Low=-55°C, Tolerance=0.2, Voltage Rating="16 V", Automotive=No, Automotive Grade=NA, Category=Cap, ComponentLink2Description=Datasheet, ComponentLink2URL=http://www.yageo.com/documents/recent/UPY-GP_NP0_16V-to-50V_16.pdf, Device Class L1="Passive Components", Device Class L2=Capacitors, Device Class L3="Ceramic Capacitors", Digikey Description="CAP CER 2.2UF 16V X5R 0402", Footprint Url=http://www.yageo.com/exep/pages/download/literatures/UPY-C_GEN_24.pdf, Height=0.55mm, Lead Free=Yes, Material=Ceramic, Octopart=https://octopart.com/cc0402mrx5r7bb225-yageo-81932627, RoHS=TRUE, Ipc Land Pattern Name=CAPC10050X50
C3 C4 C8 C11 C13 C14 C15 C19 C20 C21 C22: library part CMP-1034-02066-3, "CAP CER 0.1UF 10V 20% X7R 0402", Capacitance="0.10 μF", Manufacturer=Kemet, Manufacturer Part Number=C0402C104M8RACTU, Package=C0402-BB, Temperature="-55°C to +125°C", Temperature Characteristic=X7R, Temperature Coefficient=15%, Temperature Range High=+125°C, Temperature Range Low=-55°C, Tolerance=0.2, Voltage Rating="10 V", Automotive=No, Category=Cap, ComponentLink2Description=Datasheet, ComponentLink2URL=https://content.kemet.com/datasheets/KEM_C1002_X7R_SMD.pdf, Device Class L1="Passive Components", Device Class L2=Capacitors, Device Class L3="Ceramic Capacitors", Digikey Description="CAP CER 0.1UF 10V 20% X7R 0402", Height=0.55mm, Lead Free=Yes, Material=Ceramic, Mouser Description="Multilayer Ceramic Capacitors MLCC - SMD/SMT 10volts 0.1uF X7R 20%", Octopart=https://octopart.com/c0402c104m8ractu-kemet-9144037, RoHS=TRUE, Ipc Land Pattern Name=CAPC10050X50
C5: library part CMP-04427-002736-1, "General Purpose Ceramic Capacitor, 0402, 1uF, 20%, X5R, 15%, 16V", Capacitance=1uF, Case/Package=0402, Dielectric=X5R, Max Operating Temperature=85°C, Min Operating Temperature=-55°C, Package Quantity=10000, Tolerance=20%, Voltage Rating (DC)=16V, Packaging="Tape and Reel", RoHS Compliant=Yes
C6: library part CMP-2008-02931-1, Manufacturer="AVX Interconnect / Elco", Part Number=04025C103JAT2A
C7 C27: library part CMP-03020-034678-1, "CAP CER 10UF 6.3V X5R 0402", Case Code (Metric)=1005, Case Code (Imperial)=0402, Dielectric=X5R, Dielectric Material=Ceramic, Max Operating Temperature=85°C, Min Operating Temperature=-55°C, Tolerance=20%, Voltage Rating=6.3V, Capacitance=10uF, Case/Package=0402, Lead Free="Lead Free", Length=0.039inch, Mount="Surface Mount", Packaging="Cut Tape", REACH SVHC="No SVHC", RoHS Compliant=Yes, Thickness=0.028inch, Voltage Rating (DC)=6.3V, Width=0.02inch
C9 C10: library part CMP-00260-148574919-1, "GJM0335G2A180JB01D Gjm 0201 X8G 18PF 100V 5%", Case/Package=0201, Dielectric=X8G, Voltage Rating (DC)=100V, Capacitance=18pF, Length=600µm, Lifecycle Status=Production, NexarPartId=148574919, Thickness=300µm, Width=300µm
C12: library part CMP-03422-000819-1, "CAP CER 4.7UF 16V X5R 0402", Capacitance="4.7 uF", Manufacturer=YAGEO, Manufacturer Part Number=CC0402MRX5R7BB475, Package=CC0402, Temperature="-55°C to +125°C", Temperature Characteristic=X5R, Temperature Coefficient=30ppm/°C, Temperature Range High=+125°C, Temperature Range Low=-55°C, Tolerance=0.2, Voltage Rating="16 V", Automotive=No, Automotive Grade=NA, Category=Cap, ComponentLink2Description=Datasheet, ComponentLink2URL=http://www.yageo.com/documents/recent/UPY-GP_NP0_16V-to-50V_16.pdf, Device Class L1="Passive Components", Device Class L2=Capacitors, Device Class L3="Ceramic Capacitors", Digikey Description="CAP CER 4.7UF 16V X5R 0402", Footprint Url=http://www.yageo.com/exep/pages/download/literatures/UPY-C_GEN_24.pdf, Height=0.55mm, Lead Free=Yes, Material=Ceramic, Mouser Description="Multilayer Ceramic Capacitors MLCC - SMD/SMT 4.7uF 16V 20% Ceramic Capacitor", Octopart=https://octopart.com/cc0402mrx5r7bb475-yageo-81932628, RoHS=TRUE, Ipc Land Pattern Name=CAPC10050X50
C16: library part CMP-1034-02066-3, "CAP CER 0.1UF 10V 20% X7R 0402", Capacitance="0.10 μF", Manufacturer=Kemet, Package=C0402-BB, Temperature="-55°C to +125°C", Temperature Characteristic=X7R, Temperature Coefficient=15%, Temperature Range High=+125°C, Temperature Range Low=-55°C, Tolerance=0.2, Voltage Rating="10 V", Automotive=No, Category=Cap, ComponentLink2Description=Datasheet, ComponentLink2URL=https://content.kemet.com/datasheets/KEM_C1002_X7R_SMD.pdf, Device Class L1="Passive Components", Device Class L2=Capacitors, Device Class L3="Ceramic Capacitors", Digikey Description="CAP CER 0.1UF 10V 20% X7R 0402", Height=0.55mm, Lead Free=Yes, Manufacturer Part Number=C0402C104M8RACTU, Material=Ceramic, Mouser Description="Multilayer Ceramic Capacitors MLCC - SMD/SMT 10volts 0.1uF X7R 20%", Octopart=https://octopart.com/c0402c104m8ractu-kemet-9144037, RoHS=TRUE, Ipc Land Pattern Name=CAPC10050X50
C17 C18: library part CMP-03020-010714-1, "CAP CER 18PF 100V C0G/NP0 0402", Capacitance="18 pF", Manufacturer=KEMET, Manufacturer Part Number=CBR04C180F1GAC, Package=CBR04C, Temperature="-55°C to +125°C", Temperature Characteristic=C0G, Temperature Coefficient=30ppm/°C, Temperature Range High=+125°C, Temperature Range Low=-55°C, Tolerance=0.01, Voltage Rating="100 V", Automotive=No, Category=Cap, ComponentLink2Description=Datasheet, ComponentLink2URL=https://content.kemet.com/datasheets/KEM_C1030_CBR_SMD.pdf, Device Class L1="Passive Components", Device Class L2=Capacitors, Device Class L3="Ceramic Capacitors", Digikey Description="CAP CER 18PF 100V C0G/NP0 0402", Height=0.55mm, Lead Free=Yes, Material=Ceramic, Mouser Description="Multilayer Ceramic Capacitors MLCC - SMD/SMT 100volts 18pF C0G 0402 1% Tol RF", Octopart=https://octopart.com/cbr04c180f1gac-kemet-30609230, RoHS=TRUE, Ipc Land Pattern Name=CAPC10050X50
C23 C24: library part CMP-00260-151029462-1, Capacitance=4.7µF, Case/Package=0402, Dielectric=X6S, Voltage Rating (DC)=6.3V, Length=1mm, NexarPartId=151029462, Thickness=500µm, Width=500µm
C25: library part CMP-2008-02052-1, Manufacturer=Kemet, Part Number=C0402C105M9PACTU
C26: library part CMP-03422-000732-3, "CAP CER 2.2UF 16V X5R 0402", Capacitance=2.2uF, Case Code (Metric)=1005, Case Code (Imperial)=0402, Dielectric=X5R, Max Operating Temperature=85°C, Min Operating Temperature=-55°C, Package Quantity=5000, Tolerance=10%, Voltage Rating=16V, Case/Package=0402, Halogen Free="Halogen Free", Height=0.5mm, Lead Free="Lead Free", Length=0.039inch, Mount="Surface Mount", Packaging="Tape and Reel", RoHS Compliant=Yes, Termination=SMD/SMT, Thickness=0.022inch, Voltage Rating (DC)=16V, Weight=2.3E-05oz, Width=0.5mm
C28: library part CMP-06035-020400-1, "Chip Multilayer Ceramic Capacitors for General Purpose, 0402, 22uF, X5R, 15%, 20%, 10V"
D1 D3: library part CMP-113271-000002-1, "LED BLUE CLEAR 0402 SMD", Case Code (Metric)=1005, Case Code (Imperial)=0402, Color=Blue, Forward Voltage=3.1V, Lens Color=Colorless, Test Current=20mA, Case/Package=0402, Dominant Wavelength=465nm, Height=0.6mm, Length=1mm, Lens Size=0.5mm, Lens Style=Flat, Lens Transparency=Clear, Luminous Intensity=85mcd, Mount="Surface Mount", Packaging="Tape and Reel", Viewing Angle=140°, Width=0.5mm
D5: library part CMP-2000-04943-2, "DIODE SCHOTTKY 40V 1A SMA", Forward Current=1A, Manufacturer="ON Semiconductor", Max Junction Temp=+125°C, Max Repetitive Reverse Voltage=40V, Max Surge Forward Current=40A, Package=403AE, Peak Reverse Current=0.2mA, Temperature="-65°C to +125°C", Temperature Range Low=-65°C, Automotive=No, Category=Diode, ComponentLink2Description=Datasheet, ComponentLink2URL=https://www.onsemi.com/pub/Collateral/SS19-D.PDF, Device Class L1="Discrete Semiconductors", Device Class L2=Diodes, Device Class L3="Schottky Diodes", Digikey Description="DIODE SCHOTTKY 40V 1A SMA", Height=2.5mm, Lead Free=Yes, Manufacturer Part Number=SS14, Mouser Description="Schottky Diodes & Rectifiers SMA 40V 1.0A", Octopart=https://octopart.com/ss14-on+semiconductor-29205033, RoHS=TRUE, Standoff Height=0.05mm, Temperature Range High=+125°C
ESP32: library part CMP-10700-116589975-1, "Multiprotocol Modules SMD module, ESP32-C3FN4, PCB antenna, -40 C +85 C", Ambient Temperature Range High=85°C, Current - Receiving=84mA, Current - Transmitting=350mA, Max Frequency=2.484GHz, Max Supply Voltage=3.6V, Min Operating Temperature=-40°C, Min Supply Voltage=3V, Data Rate=150Mbps, Height=2.55mm, Max Operating Temperature=85°C, Number of GPIO=13, Interface=SPI
FLASH: "FLASH - NOR Memory IC 128Mb (16M x 8) SPI - Quad I/O, QPI, DTR 133 MHz 8-SOIC", Package="SOIC-8 Winbond Electronics", Check_prices=https://www.snapeda.com/parts/W25Q128JVSIQ/Winbond/view-part/?ref=eda, MF="Winbond Electronics", MP=W25Q128JVSIQ, SnapEDA_Link=https://www.snapeda.com/parts/W25Q128JVSIQ/Winbond/view-part/?ref=snap
GPS: "series RF Receiver BeiDou, Galileo, GLONASS, GNSS, GPS - -167dBm - - -", Package="SMD-24 u-blox", Check_prices=https://www.snapeda.com/parts/NEO-M8T-0/u-blox/view-part/?ref=eda, MF=U-Blox, MP=NEO-M8T-0, SnapEDA_Link=https://www.snapeda.com/parts/NEO-M8T-0/u-blox/view-part/?ref=snap
J4: "Charger IC Lithium Ion/Polymer SOT-23-5", Package="SOT-23 Microchip", Availability="In Stock", Check_prices=https://www.snapeda.com/parts/MCP73831T-2ACI/OT/Microchip/view-part/?ref=eda, MF=Microchip, MP=MCP73831T-2ACI/OT, Price=None, Purchase-URL=https://pricing.snapeda.com/search/part/MCP73831T-2ACI/OT/?ref=eda, SnapEDA_Link=https://www.snapeda.com/parts/MCP73831T-2ACI/OT/Microchip/view-part/?ref=snap
L1: library part CMP-08253-000063-1, "Shielded Multilayer Inductor 22uH ±20% 190mA 2145mΩ SMD 0603", Case Code (Metric)=1608, Case Code (Imperial)=0603, Current Rating=300mA, DC Resistance (DCR)=2.145R, Max Operating Temperature=125°C, Min Operating Temperature=-55°C, Package Quantity=4000, Saturation Current=50mA, Test Frequency=2MHz, Tolerance=20%, Inductance=22uH, Case/Package=0603, Core Material=Ferrite, Height=0.8mm, Height - Seated (Max)=0.037inch, Lead Free="Lead Free", Length=0.063inch, Mount="Surface Mount", Packaging="Tape and Reel", RoHS Compliant=Yes, Shielding=Shielded, Termination=SMD/SMT, Weight=0.000141oz, Width=0.031inch
MCU: "ARMÂ® CortexÂ®-M4 STM32F4 Microcontroller IC 32-Bit Single-Core 168MHz 1MB (1M x 8) FLASH 64-LQFP (10x10)", Package="LQFP-64 STMicroelectronics", Check_prices=https://www.snapeda.com/parts/STM32F405RGT6/STMicroelectronics/view-part/?ref=eda, MF=STMicroelectronics, MP=STM32F405RGT6, SnapEDA_Link=https://www.snapeda.com/parts/STM32F405RGT6/STMicroelectronics/view-part/?ref=snap
PWR STAT: library part CMP-08952-000002-1, "LED RED CLEAR 0402 SMD", Colour=Red, Forward Current=20mA, Forward Voltage=2V, Manufacturer=Rohm, Package=SML-P1, Power Dissipation=50mW, Reverse Voltage=5V, Temperature="-40°C to +85°C", Temperature Range High=+85°C, Temperature Range Low=-40°C, Automotive=No, Category=Diode, ComponentLink2Description=Datasheet, ComponentLink2URL=https://www.rohm.com/datasheet/SML-P12VT(R)/sml-p1-e, Device Class L1=Optoelectronics, Device Class L2=LEDs, Device Class L3=unset, Digikey Description="LED RED CLEAR 0402 SMD", Height=0.25mm, Lead Free=Yes, Led Orientation="Top View", Luminous Intensity=60mcd, Manufacturer Part Number=SML-P12VTT86R, Mouser Description="SML-P1 Series Red 0402 Clear 60 mcd 2V Surface Mount PICOLED? LED", Octopart=https://octopart.com/sml-p12vtt86r-rohm-34112315, RoHS=TRUE, Wavelength=630nm
R1 R2 R3 R4 R5 R7 R8: library part CMP-03412-046242-1, "Anti-Sulfurated Chip Resistors Automotive Grade 10kΩ 1% 100ppm/°C 0402", Case Code (Metric)=1005, Case Code (Imperial)=0402, Max Operating Temperature=155°C, Max Power Dissipation=63mW, Min Operating Temperature=-55°C, Package Quantity=10000, Power Rating=62.5mW, Resistance=10kR, Resistor Type="Thick Film", Temperature Coefficient=200ppm/°C, Tolerance=1%, Voltage Rating=50V, Case/Package=0402, Features=Anti-Sulfur, Height=0.32mm, Length=1mm, Number of Terminations=2, Packaging="Cut Tape", RoHS Compliant=Yes, Series=AF, Technology="THICK FILM", Termination=SMD/SMT, Weight=2.3E-05oz, Width=0.5mm
R6 R11 R13 R19 R23 R25: library part CMP-03412-049712-1, "RES 470Ω ±5% 0.063W 0402"
R9: library part CMP-03412-042271-1, "RES 510kΩ ±0.5% 0.063W 0402", RoHS Compliant=Yes
R10 R12 R16 R17: library part CMP-03412-022855-2, "RES 100Ω ±1% 0.063W 0402", Case/Package=0402, Resistance=100R, Tolerance=1%, RoHS Compliant=Yes
R14: library part CMP-2002-06970-1, Manufacturer=Yageo, Part Number=RC0402JR-100RL
R15 R18: library part CMP-03412-009386-2, "RES 4.7kΩ ±1% 0.063W 0402"
R20: library part CMP-03412-047704-1, "RES 2kΩ ±1% 0.063W 0402"
R21 R22: library part CMP-03412-038544-1, "RES 5.1kΩ ±5% 0.063W 0402", Case Code (Metric)=1005, Case Code (Imperial)=0402, Max Operating Temperature=155°C, Max Power Dissipation=63mW, Min Operating Temperature=-55°C, Power Rating=62.5mW, Resistance=5.1kR, Resistor Type="Thick Film", Temperature Coefficient=100ppm/°C, Tolerance=5%, Voltage Rating=50V, Case/Package=0402, Features="Moisture Resistant", Height=0.015inch, Length=0.039inch, Number of Terminations=2, Packaging="Tape and Reel", RoHS Compliant=Yes, Series=AC, Termination=SMD/SMT, Weight=2.3E-05oz, Width=0.5mm
R24: library part CMP-03412-048471-1, "Anti-Sulfurated Chip Resistors Automotive Grade 73.2kΩ 1% 100ppm/°C 0402", Case/Package=0402, Max Operating Temperature=155°C, Max Power Dissipation=63mW, Min Operating Temperature=-55°C, Resistance=73.2kR, Resistor Type="Thick Film", Temperature Coefficient=100ppm/°C, Tolerance=1%, Features="Moisture Resistant", Height=0.015inch, Length=0.039inch, Number of Terminations=2, Packaging="Tape and Reel", RoHS Compliant=Yes, Series=AF, Width=0.02inch
SD: library part CMP-2000-05621-1, "Micro SD Connector, Pitch 1.1 mm, 8 Position, Height 1.4 mm, -25 to 85 degC, RoHS, Tape and Reel", Current Rating=500mA, Manufacturer=Molex, Package Description="Micro SD Connector, Pitch 1.1 mm, 8 Position, Height 1.4 mm", Voltage Rating=10VAC/DC, Brand=Molex, Datasheet URL=http://www.molex.com/pdm_docs/sd/5033981892_sd.pdf, Datasheet Version="Rev. E, 04/2006", Factory Pack Quantity=2400, Manufacturer URL=http://www.molex.com/, Mounting Technology=SurfaceMount, Package Reference=503398-1892, Packaging=Reel, Product Category=MemoryCardConnectors, RoHS=Details, Series=503398
SW: library part CMP-2000-05087-3, "SWITCH SLIDE DPDT 300MA 6V", Actuator Color=Black, Contact Current Rating=300mA, Contact Resistance=70mR, Flammability Rating="UL94 V-2", Max Operating Temperature=85°C, Max Voltage Rating (DC)=6V, Min Operating Temperature=-20°C, Package Quantity=1, Actuator Length=2mm, Actuator Material=Nylon, Actuator Type=Standard, Contact Material="Copper Alloy", Contact Plating=Silver, Current Rating=300mA, Depth=7.5mm, Electrical Life=5000Cycles, Housing Material=Nylon, Lead Free="Lead Free", Length=9mm, Max Current Rating=300mA, Mount="Surface Mount", Orientation=Vertical, Packaging="Tape and Reel", Radiation Hardening=No, REACH SVHC="No SVHC", Series=JS, Switch Function=On-On, Switch Travel=2mm, Termination="Gull Wing", Throw Configuration=DPDT, Voltage Rating (DC)=6V
"SWD Programmer": library part CMP-1029-00144-1, "Press Fit Header, Through-hole, Vertical, -55 to 125 degC, 2 mm Pitch, 10-Pin, Male, RoHS", Manufacturer=Samtec, Temperature Range="-55 to 125 degC", ComponentLink1Description="Manufacturer URL", ComponentLink1URL=http://www.samtec.com, ComponentLink2Description=Datasheet, ComponentLink2URL=http://d2a072wq521u33.cloudfront.net/catalog_english//ptt.pdf, ComponentLink3Description="Package Specification", ComponentLink3URL=http://www.samtec.com/documents/webfiles/cpdf/PTT-1XX-XX-XX-X-XXX-MKT.pdf, DatasheetVersion=F-214, Mounting Technology=Through-hole, Orientation=Vertical, PackageDescription="2 mm Press Fit Terminal Strip", PackageReference=PTT-105-01-X-D, PackageVersion="E, 12/2000", PartNumber=PTT-105-01-L-D, Pitch="2 mm", RoHS=True
TP: library part CMP-113271-000003-1, "LED YELLOW CLEAR 0402 SMD", Case Code (Metric)=1005, Case Code (Imperial)=0402, Color=Yellow, Forward Voltage=2V, Lens Color=Colorless, Test Current=20mA, Case/Package=0402, Dominant Wavelength=590nm, Height=0.6mm, Length=1mm, Lens Size=0.5mm, Lens Style=Flat, Lens Transparency=Clear, Luminous Intensity=95mcd, Mount="Surface Mount", Packaging="Tape and Reel", Viewing Angle=140°, Width=0.5mm
U4: "Description", Manufacturer_Name="Diodes Inc", Copyright="Copyright (C) 2025 Ultra Librarian. All rights reserved.", Manufacturer_Part_Number=AP7361C-33E-13, RefDes=RefDes, Type=Type
U5: "High Efficiency 1.2MHz2A Step Up Converter", Package=Package, Availability="Not in stock", Check_prices=https://www.snapeda.com/parts/MT3608/Aerosemi+Technology+Co.%252C+Ltd/view-part/?ref=eda, MF="Aerosemi Technology Co., Ltd", MP=MT3608, Price=None, SnapEDA_Link=https://www.snapeda.com/parts/MT3608/Aerosemi+Technology+Co.%252C+Ltd/view-part/?ref=snap
USB-C: "USB Connectors 24 Receptacle 1 8.94*7.3mm RoHS", Package=Package, Check_prices=https://www.snapeda.com/parts/TYPE-C-31-M-12/HRO+Electronics+Co.%252C+Ltd./view-part/?ref=eda, MF="HRO Electronics Co., Ltd.", MP=TYPE-C-31-M-12, SnapEDA_Link=https://www.snapeda.com/parts/TYPE-C-31-M-12/HRO+Electronics+Co.%252C+Ltd./view-part/?ref=snap
Y1: library part CMP-27762-013675-1, "Crystal 8MHz ±30ppm 18pF SMD-2 5mm x 3.2mm", Case/Package=SMD/SMT, ESR (Equivalent Series Resistance)=140R, Frequency=8MHz, Frequency Stability=30ppm, Load Capacitance=18pF, Max Operating Temperature=70°C, Min Operating Temperature=-20°C, Frequency Tolerance=30ppm, Height=0.051inch, Length=0.197inch, Mount="Surface Mount", Packaging="Tape and Reel", RoHS Compliant=Yes, Width=0.126inch

## Via types
v1: diameter 0.6, hole 0.3, L1 to L4, tented both sides, 151 vias
v2: diameter 0.6, hole 0.3, L1 to L4, 20 vias

## Nets (pads, with @x,y where several pads share a name; then routed paths per layer and width w, separated by ;. In a path a pad name is that pad's centre, name@x,y a point inside that pad or via, vN(x,y) a via of type N, cw(c..) or ccw(c..) an arc to the next point about the centre after c; other vN are vias at no path point)
CD_A: MCU.34 SD.9 | length 47.9
  L1 w0.203: v1(-2.515,56.337) -2.439,56.261 -2.439,55.772 -2.087,55.421 -1.791,55.421 SD.9 ; MCU.34 32.816,42.805 32.816,44.754 v1(32.842,44.78)
  L3 w0.203: v1(-2.515,56.337) 1.473,60.325 18.618,60.325 32.842,46.101 v1(32.842,44.78)
CLK: MCU.53 SD.5 | length 23.4
  L1 w0.203: SD.5 12.561,53.276 13.462,52.375 v1(13.462,52.324) ; v1(21.133,39.421) 21.133,39.395 21.63,38.898 23.832,38.898 MCU.53
  L3 w0.203: v1(13.462,52.324) 14.73,51.056 17.067,51.056 18.186,49.936 18.186,42.342 21.107,39.421 v1(21.133,39.421)
CMD: MCU.54 SD.3 | length 26.9
  L1 w0.203: SD.3 12.387,55.476 v1(12.72,55.143) ; v1(18.847,38.43) 18.882,38.395 23.835,38.395 MCU.54
  L3 w0.203: v1(12.72,55.143) 12.72,43.465 17.831,38.354 18.771,38.354 v1(18.847,38.43)
DAT0: MCU.39 R7.2 SD.7 | length 30.7
  L1 w0.203: SD.7 13.796,51.076 14.043,50.829 15.037,50.829 15.084,50.876 15.697,50.876 15.773,50.952 v1(29.82,50.952) ; MCU.39 30.296,42.773 30.296,41.129 v1(30.302,41.123)
  L4 w0.203: v1(29.82,50.952) 29.82,50.91 30.302,50.428 v1(30.302,41.123)
DAT1: MCU.40 R8.2 SD.8 | length 25.1
  L1 w0.203: SD.8 12.381,49.976 13.386,48.971 R8.2 14.532,47.927 17.678,44.78 v1(22.403,44.78) ; v1(27.254,40.462) 28.727,40.462 29.79,41.525 MCU.40
  L4 w0.203: v1(22.403,44.78) 26.649,40.534 27.183,40.534 v1(27.254,40.462)
DAT2: MCU.51 R4.1 SD.1 | length 31.5
  L1 w0.203: SD.1 12.464,57.676 13.132,58.344 14.151,58.344 14.173,58.366 14.173,59.176 14.453,59.456 v1(14.453,59.563) ; MCU.51 25.198,39.859 v1(25.445,40.107)
  L3 w0.203: v1(14.453,59.563) 14.478,59.588 16.104,59.588 21.844,53.848 21.844,46.33 25.445,42.729 v1(25.445,40.107)
DAT3: MCU.52 R5.1 SD.2 | length 32.5
  L1 w0.203: SD.2 R5.1@13.979,56.576 ; v1(14.148,55.441) 14.148,56.563 R5.1 ; MCU.52 25.012,39.359 25.434,38.938 26.314,38.938 v1(26.34,38.964)
  L3 w0.203: v1(14.148,55.441) 17.812,55.441 19.914,53.34 19.914,41.961 22.911,38.964 v1(26.34,38.964)
GND: "AUX UART.5" "AUX UART.6" "AUX UART.7" "SWD Programmer.2" "SWD Programmer.6" "SWD Programmer.10" ADC.4 ANT.2 ANT.3 BATT.2 C1.2 C2.2 C3.1 C4.1 C7.2 C8.1 C9.2 C10.2 C11.1 C12.2 C13.1 C14.1 C15.1 C16.1 C17.1 C18.1 C19.2 C20.2 C21.1 C22.1 C23.2 C24.2 C25.2 C26.2 C27.1 C28.2 D1.1 D3.1 DP.4 ESP32.1 ESP32.2 ESP32.11 ESP32.14 ESP32.36 ESP32.37 ESP32.38 ESP32.39 ESP32.40 ESP32.41 ESP32.42 ESP32.43 ESP32.44 ESP32.45 ESP32.46 ESP32.47 ESP32.48 ESP32.49 ESP32.50 ESP32.51 ESP32.52 ESP32.53 FLASH.4 GPS.10 GPS.12 GPS.13 GPS.24 J4.2 MCU.18 MCU.63 PWR.1 R1.2 R20.1 R21.2 R22.2 R25.1 SD.6 SD.10 SD.11 SD.12 SD.13 SD.14 TP.1 U4.2 U4.4 U5.2 USB-C.A1_B12 USB-C.B1_A12 USB-C.S1 USB-C.S2 USB-C.S3 USB-C.S4
  other v1: 39.497,2.057 28.372,2.134 31.496,3.658 25.502,3.708 39.599,7.785 35.281,9.169 4.013,10.109 18.44,10.77 27.381,11.024 22.936,11.328 8.763,12.776 27.534,13.183 7.874,14.199 39.421,16.332 14.681,16.637 37.282,18.036 29.972,18.898 15.392,19.38 10.668,20.803 24.384,21.031 21.514,21.057 22.962,21.057 7.95,21.438 3.937,25.044 31.293,25.857 25.73,27.127 30.531,27.153 29.566,27.178 4.47,27.915 30.505,29.82 47.955,30.251 7.544,30.531 9.576,31.648 49.809,32.385 37.846,32.639 19.075,33.249 15.621,33.579 25.324,33.807 33.833,34.011 9.627,34.493 19.025,35.331 51.359,36.982 40.132,39.116 40.107,40.767 50.241,41.91 -1.321,44.907 23.571,45.542 38.557,45.695 27.051,47.523 -0.432,47.854 10.541,47.879 43.586,48.235 9.754,52.222 14.529,52.756 16.586,52.756 64.618,58.496 -0.483,59.334 55.956,59.487 56.794,59.487 57.633,59.487 58.471,59.487 59.33,59.492 60.168,59.492 61.007,59.492 61.845,59.492 62.663,59.499 52.299,59.969 39.954,62.205 52.248,62.255 55.855,62.459 56.693,62.459 57.531,62.459 58.369,62.459 59.229,62.464 60.067,62.464 60.905,62.464 61.743,62.464 62.561,62.47 0.076,62.738 11.024,62.865 64.719,63.729
  other v2: 0.076,32.969 0.076,34.163 0.076,35.433 2.568,35.712 4.544,35.712 1.581,36.7 3.556,36.7 5.531,36.7 0.076,36.728 2.568,37.687 4.544,37.687 0.076,38.202 1.581,38.675 3.556,38.675 5.531,38.675 0.051,39.624 2.568,39.662 4.544,39.662 0.076,40.919 0.076,42.164
NetC1_1: C1.1 MCU.31 | length 3.4
  L1 w0.203: MCU.31 36.374,40.359 37.575,39.158 38.04,39.158 C1.1
NetC2_1: C2.1 MCU.47 | length 3
  L1 w0.203: MCU.47 26.29,43.994 27.026,44.729 27.026,45.169 C2.1
NetC3_2: "AUX UART.2" "SWD Programmer.1" ADC.3 C3.2 C5.2 C6.1 C7.1 C8.2 C11.2 C12.1 C13.2 C14.2 C15.2 C20.1 C26.1 DP.1 ESP32.3 FLASH.8 GPS.22 GPS.23 MCU.1 MCU.13 MCU.19 MCU.32 MCU.48 MCU.64 R2.1 R3.1 R4.2 R5.2 R7.1 R8.1 R9.1 R15.2 R18.2 R23.2 SD.4 U4.3 | length 57
  L1 w0.203: R5.2 v1(16.18,56.566) ; R4.2 15.021,58.356 16.243,58.356 v1(16.256,58.344) ; R8.1@15.427,48.933 v1@16.447,48.933 ; R7.1 v1(17.091,51.66) ; 22.47,33.359 MCU.64 ; 25.679,44.348 25.679,44.044 25.79,43.933 MCU.48 ; 25.79,30.268 MCU.1 ; MCU.13 31.79,29.322 32.427,28.685 C5.2 32.427,27.669 32.283,27.526 32.283,26.882 32.301,26.865 32.301,25.815 v1(32.309,25.806) ; MCU.19 36.62,34.359 ; MCU.32@35.224,40.846 MCU.32@35.898,40.846 ; MCU.32@35.899,40.846 36.828,40.846 ; v1(39.268,50.419) GPS.22 ; R3.1@39.294,26.673 40.713,26.673 40.919,26.467 FLASH.8@42.191,26.467 ; v1(39.294,49.327) 41.821,49.327 GPS.23 ; 42.215,25.679 FLASH.8@42.215,26.49 ; C3.2@42.336,24.708 R2.1@44.983,24.708
  L1 w0.254: v1(48.235,12.294) R18.2 ; v1@48.425,14.922 R15.2@49.551,14.922
  L1 w0.381: ESP32.3 1.156,30.975 1.575,30.556 ; R8.1 R8.1@15.427,48.933 ; v1@16.447,48.933 v1(16.485,48.895) ; 21.86,33.359 22.47,33.359 ; 25.679,44.348 25.679,44.729 ; 25.758,29.766 25.79,29.798 25.79,30.268 ; 36.62,34.359 37.243,34.359 ; 36.83,40.843 37.262,40.843 ; 42.215,25.248 42.215,25.679
  L1 w0.508: v1(20.955,32.36) 20.955,32.384 21.025,32.454 C13.2 21.851,33.35 ; v1(24.765,29.007) 24.783,29.024 24.848,29.024 24.873,29.05 C12.1 25.781,29.743 ; v1(25.552,46.609) 25.552,46.584 25.444,46.476 25.444,44.964 25.679,44.729 ; 37.243,34.359 C11.2@37.888,34.359 ; 37.262,40.843 C15.2@38.029,40.843 ; C11.2 39.053,34.353 39.091,34.315 v1(39.116,34.315) ; C15.2 38.138,40.849 38.138,41.669 38.227,41.758 v1(38.227,41.783) ; v1(40.919,24.562) 40.944,24.562 41.09,24.708 C3.2 42.215,25.248
  L1 w0.635: 1.575,30.556 2.14,29.991 2.14,29.094 2.148,29.086 v1(2.148,28.233) ; SD.4 11.002,54.343 12.359,54.343 12.38,54.323 17.671,54.323 v1(17.7,54.352)
  other v1: 36.195,7.341 24.486,8.941 25.527,8.966 26.543,8.966 24.46,9.804 26.543,9.804 25.527,9.83 48.412,14.91
NetC16_2: C16.2 ESP32.8 R9.2 | length 4.3
  L1 w0.203: R9.2 2.928,29.626 4.436,29.626 C16.2 4.464,29.616 4.902,29.616 5.156,29.87 ESP32.8
NetC17_2: C17.2 GPS.11 R14.1 | length 4.7
  L1 w0.116: GPS.11 56.959,61.12 C17.2 58.498,61.106 R14.1@58.51,61.094
NetC18_2: ANT.1 C18.2 R14.2 | length 3.7
  L1 w0.116: R14.2 61.055,61.112 C18.2 ANT.1@63.118,61.106
NetC19_1: "AUX UART.1" C19.1 C28.1 D5.2 R24.2
NetC21_2: ADC.1 C21.2 MCU.14 | length 30.1
  L1 w0.203: MCU.14 32.29,29.94 34.823,27.407 v1(35.458,27.407) ; v1(51.664,30.988) 51.664,32.41 54.762,32.41 ADC.1
  L4 w0.203: v1(35.458,27.407) 35.522,27.407 35.776,27.153 50.825,27.153 51.664,27.991 v1(51.664,30.988)
NetC22_2: ADC.2 C22.2 MCU.15 | length 25.8
  L1 w0.203: MCU.15 32.829,31.401 32.829,30.417 33.782,29.464 v1(35.382,29.464) ; v1(48.997,35.077) 49.013,35.093 51.902,35.093 51.918,35.109 51.934,35.093 54.873,35.093 ADC.2
  L4 w0.203: v1(35.382,29.464) 35.458,29.54 35.941,29.54 41.478,35.077 v1(48.997,35.077)
NetD1_2: D1.2 R6.2 | length 1.3
  L1 w0.203: R6.2 35.158,45.733 36.444,45.733 D1.2
NetD2_2: R11.1 TP.2 | length 1.5
  L1 w0.203: R11.1 50.178,45.385 50.178,43.947 TP.2
NetD3_2: D3.2 R13.2 | length 1.7
  L1 w0.203: R13.2 D3.2
NetD4_1: R19.2 STAT.1 | length 2
  L1 w0.203: R19.2 12.281,13.178 14.263,13.178 STAT.1
NetD4_2: J4.1 STAT.2 | length 2.4
  L1 w0.203: J4.1 13.233,14.402 13.545,14.09 STAT.2
NetD5_1: D5.1 L1.2 U5.1 | length 6.7
  L1 w0.203: U5.1 30.949,17.551 31.979,17.551 32.893,16.637 32.893,12.268
NetD6_2: PWR.2 R23.1 | length 1.4
  L1 w0.203: PWR.2 R23.1
NetJ2_3: "AUX UART.3" R16.1 | length 2.3
  L1 w0.203: R16.1 33.579,6.68 33.974,6.285 33.974,5.105
NetJ2_4: "AUX UART.4" R17.1 | length 2.5
  L1 w0.203: R17.1 31.876,7.196 32.766,6.306 32.766,5.147 32.724,5.105
NetJ4_5: J4.5 R20.2 | length 1.8
  L1 w0.203: R20.2 10.263,14.171 10.263,14.683 10.643,15.062 J4.5
NetJ5_A5: R21.1 USB-C.A5 | length 6.6
  L1 w0.203: R21.1 3.912,19.71 4.782,18.84 USB-C.A5
NetJ5_B5: R22.1 USB-C.B5 | length 6.1
  L1 w0.203: R22.1@3.982,11.961 3.982,15.002 4.853,15.872 USB-C.B5@6.649,15.872
NetMD1_13: ESP32.13 R13.1 | length 2.4
  L1 w0.203: ESP32.13 8.472,33.671 10.838,33.671 R13.1
NetMD1_23: "SWD Programmer.9" ESP32.23 | length 28.9
  L1 w0.203: ESP32.23 10.064,41.687 11.481,43.104 v1(11.481,43.18)
  L4 w0.203: v1(11.481,43.18) 12.471,43.18 18.313,49.022 18.313,59.131 20.574,61.392 23.229,61.392
NetMD1_30: ESP32.30 R10.1 | length 12
  L1 w0.203: ESP32.30 3.556,42.869 4.185,42.24 v1(4.293,42.24) ; v1(12.929,42.24) 12.967,42.278 14.524,42.278 R10.1
  L4 w0.203: v1(4.293,42.24) v1(12.929,42.24)
NetMD1_31: ESP32.31 R12.1 | length 14.3
  L1 w0.203: v1(2.718,41.986) 2.737,42.005 2.737,43.568 ESP32.31 ; v1(12.7,40.183) 12.725,40.208 14.613,40.208 R12.1
  L4 w0.203: v1(2.718,41.986) 3.658,41.046 10.82,41.046 11.684,40.183 v1(12.7,40.183)
NetP1_3: "SWD Programmer.3" MCU.46 | length 23.1
  L1 w0.203: MCU.46 26.794,42.776 26.794,41.431 v1(26.797,41.427)
  L4 w0.203: v1(26.797,41.427) 26.797,43.637 27.864,44.704 27.864,52.248 30.181,54.565 30.181,60.439 29.229,61.392
NetP1_4: "SWD Programmer.4" MCU.49 | length 24
  L1 w0.203: v1(22.082,40.859) MCU.49
  L4 w0.203: v1(22.082,40.859) 21.209,41.732 21.209,46.965 25.926,51.682 25.926,55.034 29.229,58.337 29.229,59.392
NetP1_7: "SWD Programmer.7" MCU.16 R10.2 | length 48.7
  L1 w0.203: R10.2 v1(17.018,42.316) ; v1(31.928,33.604) 33.252,32.28 33.252,31.478 MCU.16
  L4 w0.203: 25.229,61.392 24.276,60.439 22.272,60.439 22.267,60.444 20.193,58.369 20.193,49.301 17.018,46.126 v1(17.018,42.316) 17.018,38.354 18.059,37.313 26.365,37.313 29.998,33.68 31.852,33.68 v1(31.928,33.604)
NetP1_8: "SWD Programmer.8" MCU.17 R12.2 | length 44.6
  L1 w0.203: R12.2 15.651,40.221 18.021,40.221 v1(18.034,40.208) ; v1(31.445,35.484) 33.574,33.355 35.206,33.355 MCU.17
  L4 w0.203: 25.229,59.392 22.022,56.185 22.022,49.301 18.034,45.314 v1(18.034,40.208) 19.99,38.252 28.677,38.252 v1(31.445,35.484)
NetP3_2: DP.2 MCU.59 R18.1 | length 66
  L1 w0.203: v1(16.789,35.535) 17.628,36.373 21.793,36.373 22.268,35.898 23.832,35.898 MCU.59 ; R18.1@50.597,12.344 54.508,12.344 DP.2
  L4 w0.203: v1(16.789,35.535) 16.789,23.546 19.98,20.355 36.846,20.355 44.069,13.132 53.823,13.132 DP.2
NetP3_3: DP.3 MCU.58 R15.1 | length 66.1
  L1 w0.203: MCU.58 23.876,36.353 26.004,36.353 v1(26.01,36.347) ; R15.1@50.597,14.935 DP.3